# EAGLE board Qwiic_Chirp_101-Panel (EAGLE 9.6.2), part 1 of 4
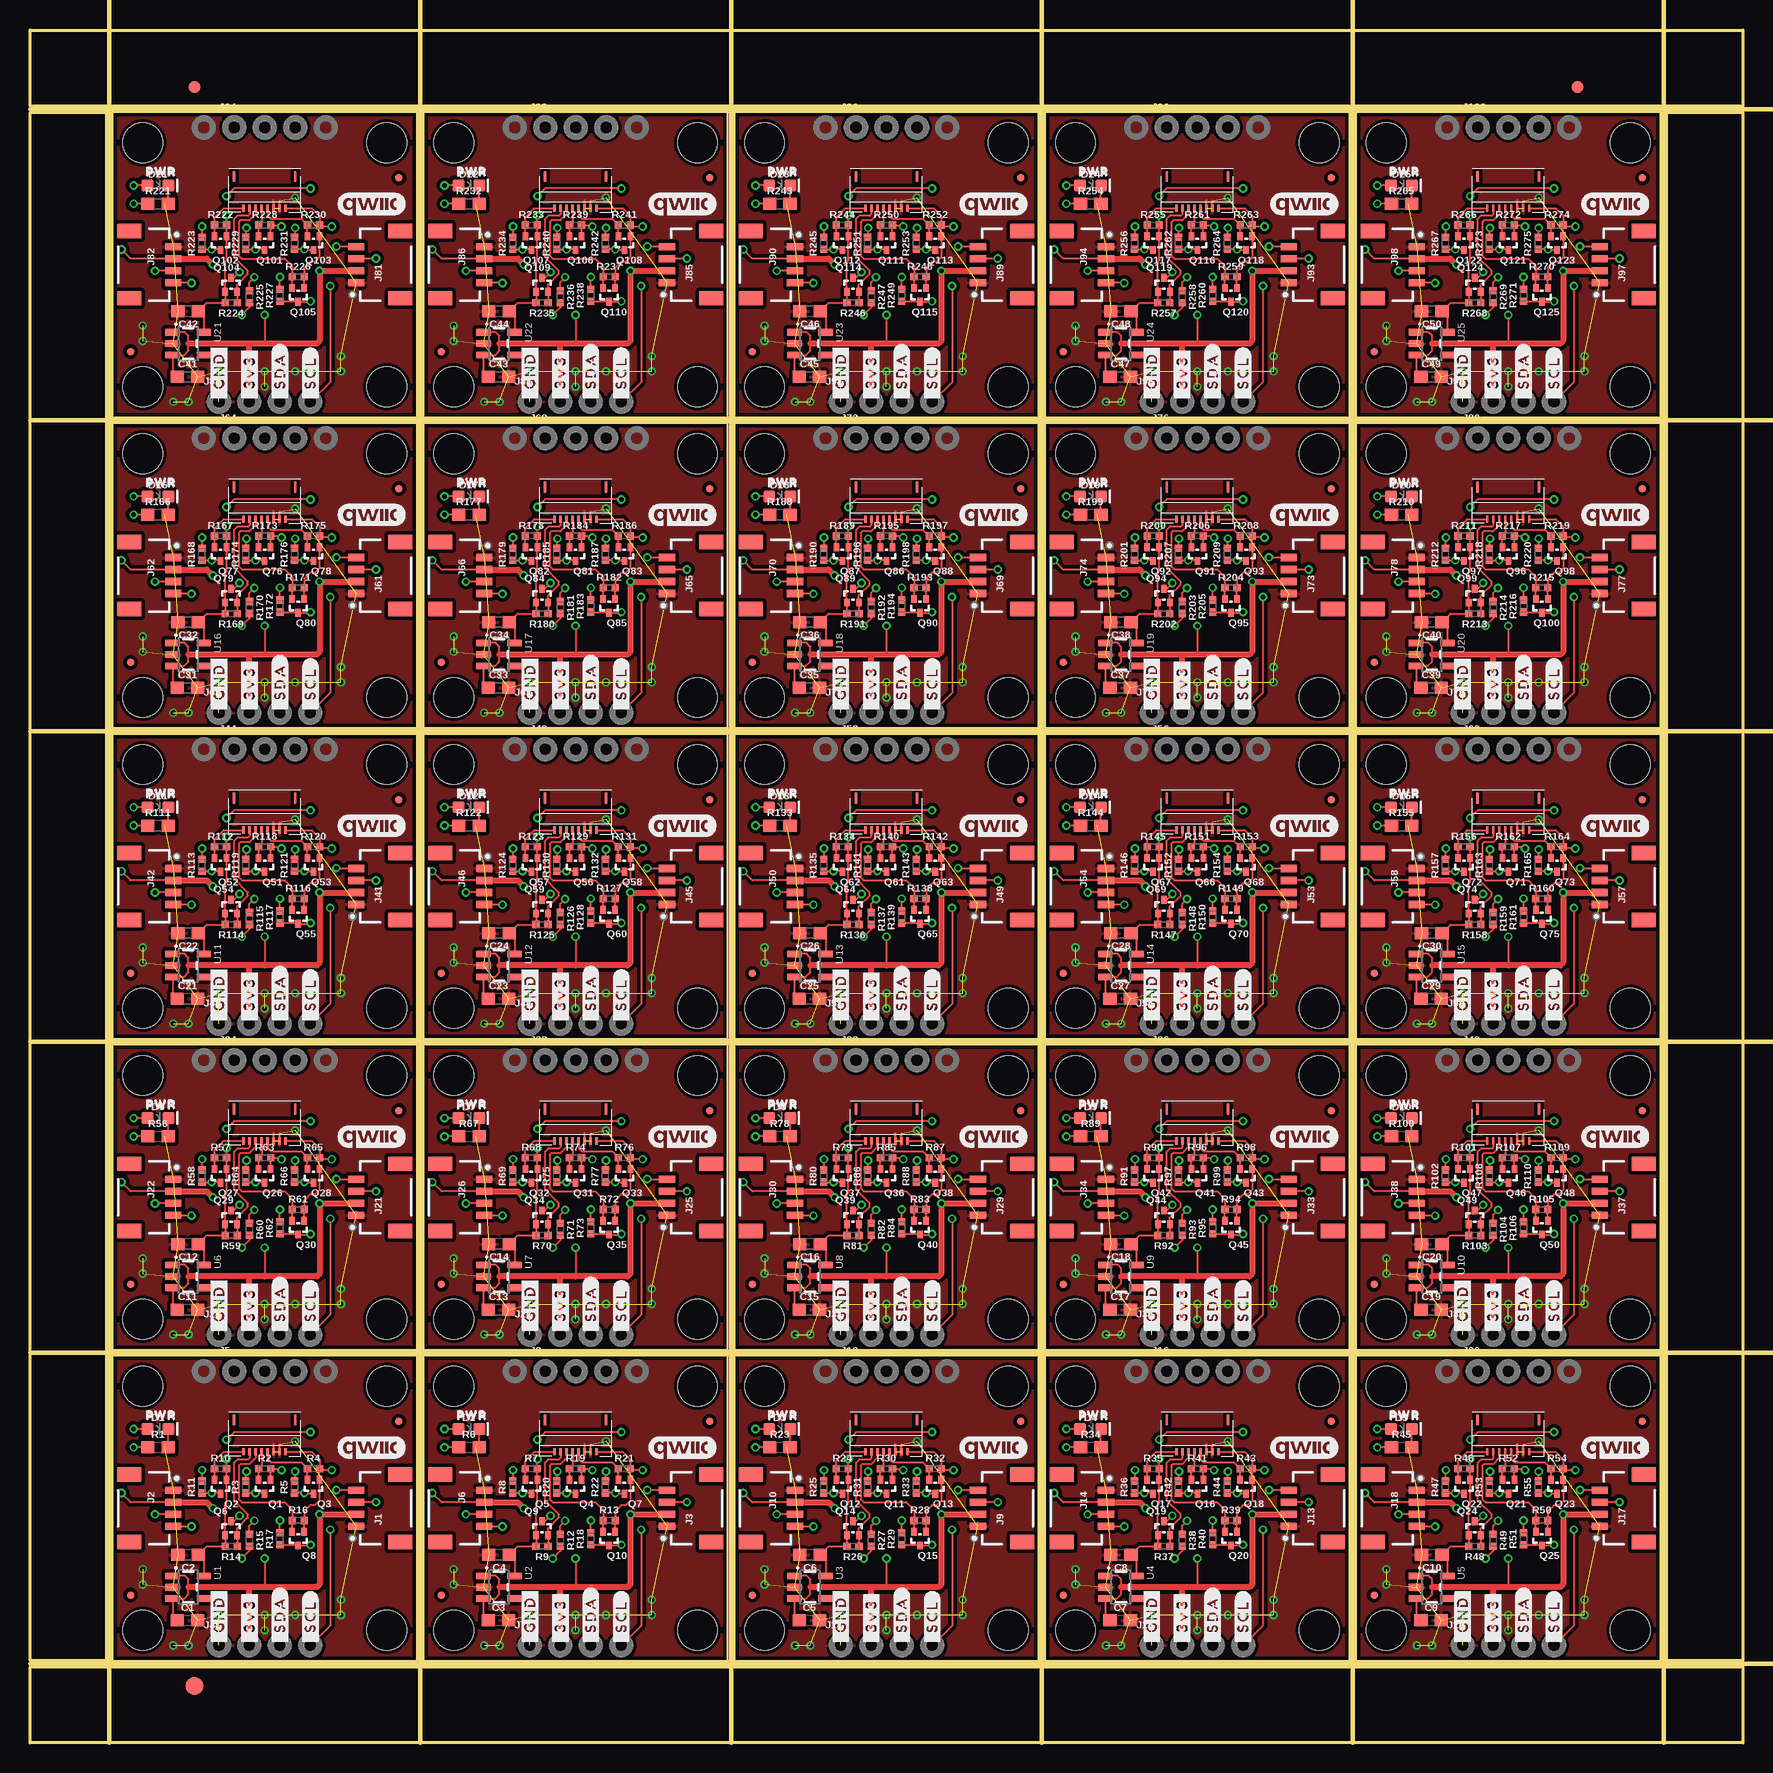
[diagram p0: board, top side]
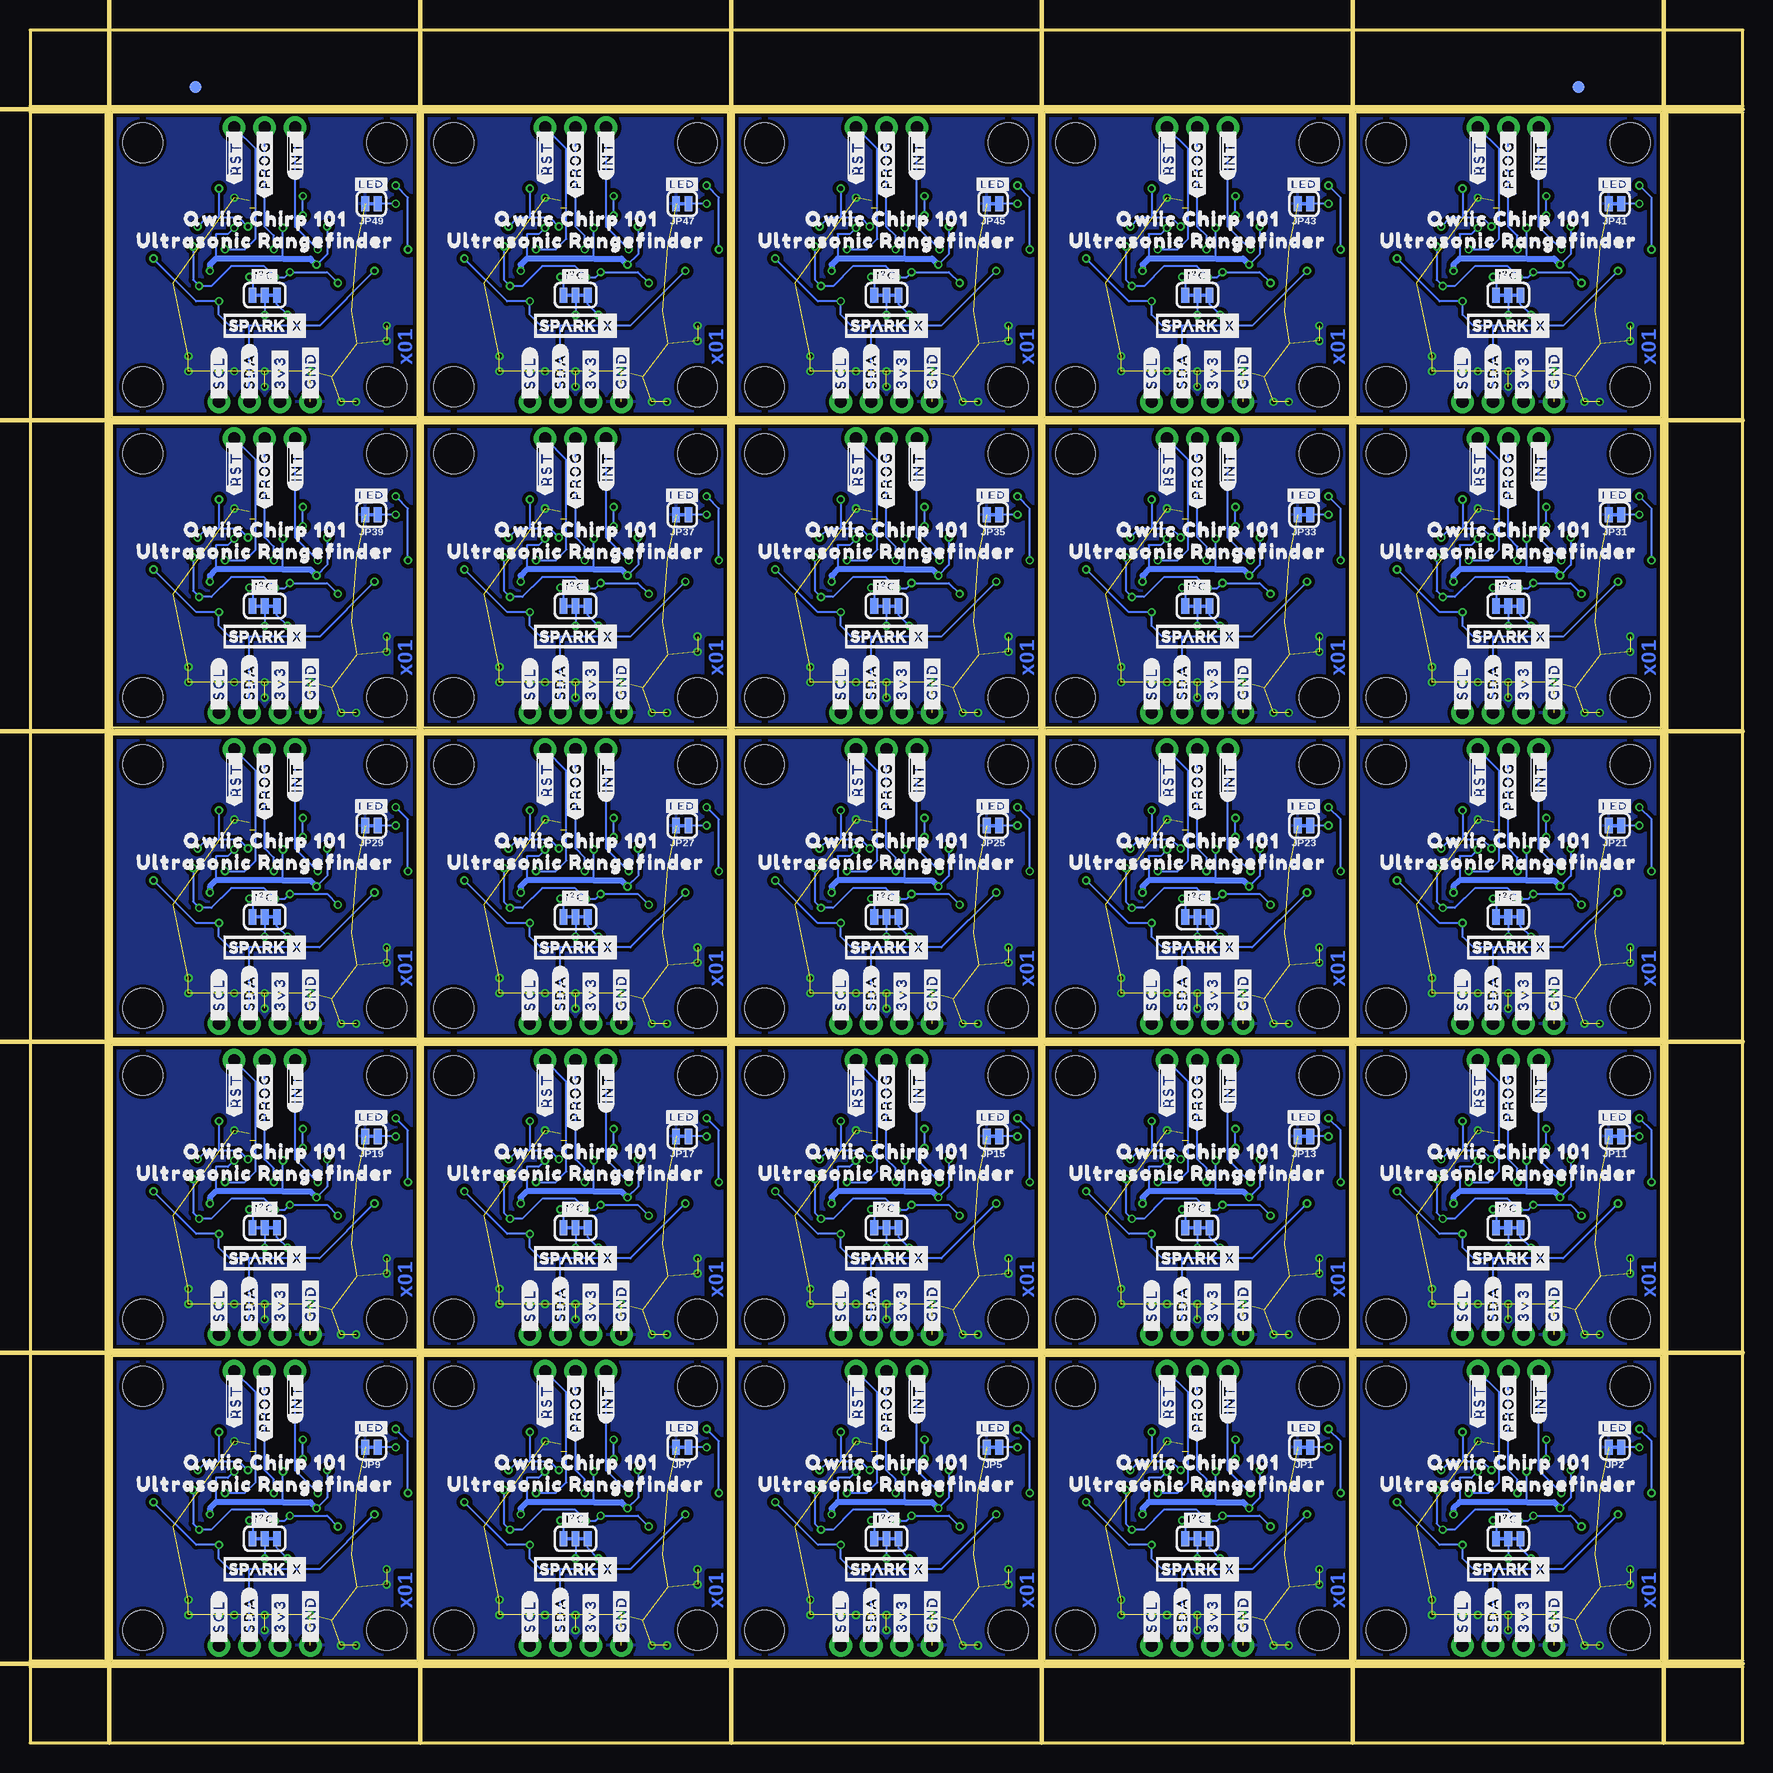
[diagram p1: board, bottom side, seen from below]

Size 142.75 x 142.75 mm. Coordinates in mm from the lower left corner, seen from the top.
Outline: 6.86,6.86 32.26,6.86 32.26,32.26 6.86,32.26 6.86,6.86
Outline: 32.77,6.86 58.17,6.86 58.17,32.26 32.77,32.26 32.77,6.86
Outline: 58.67,6.86 84.07,6.86 84.07,32.26 58.67,32.26 58.67,6.86
Outline: 84.58,6.86 109.98,6.86 109.98,32.26 84.58,32.26 84.58,6.86
Outline: 110.49,6.86 135.89,6.86 135.89,32.26 110.49,32.26 110.49,6.86
Outline: 6.86,32.77 32.26,32.77 32.26,58.17 6.86,58.17 6.86,32.77
Outline: 32.77,32.77 58.17,32.77 58.17,58.17 32.77,58.17 32.77,32.77
Outline: 58.67,32.77 84.07,32.77 84.07,58.17 58.67,58.17 58.67,32.77
Outline: 84.58,32.77 109.98,32.77 109.98,58.17 84.58,58.17 84.58,32.77
Outline: 110.49,32.77 135.89,32.77 135.89,58.17 110.49,58.17 110.49,32.77
Outline: 6.86,58.67 32.26,58.67 32.26,84.07 6.86,84.07 6.86,58.67
Outline: 32.77,58.67 58.17,58.67 58.17,84.07 32.77,84.07 32.77,58.67
Outline: 58.67,58.67 84.07,58.67 84.07,84.07 58.67,84.07 58.67,58.67
Outline: 84.58,58.67 109.98,58.67 109.98,84.07 84.58,84.07 84.58,58.67
Outline: 110.49,58.67 135.89,58.67 135.89,84.07 110.49,84.07 110.49,58.67
Outline: 6.86,84.58 32.26,84.58 32.26,109.98 6.86,109.98 6.86,84.58
Outline: 32.77,84.58 58.17,84.58 58.17,109.98 32.77,109.98 32.77,84.58
Outline: 58.67,84.58 84.07,84.58 84.07,109.98 58.67,109.98 58.67,84.58
Outline: 84.58,84.58 109.98,84.58 109.98,109.98 84.58,109.98 84.58,84.58
Outline: 110.49,84.58 135.89,84.58 135.89,109.98 110.49,109.98 110.49,84.58
Outline: 6.86,110.49 32.26,110.49 32.26,135.89 6.86,135.89 6.86,110.49
Outline: 32.77,110.49 58.17,110.49 58.17,135.89 32.77,135.89 32.77,110.49
Outline: 58.67,110.49 84.07,110.49 84.07,135.89 58.67,135.89 58.67,110.49
Outline: 84.58,110.49 109.98,110.49 109.98,135.89 84.58,135.89 84.58,110.49
Outline: 110.49,110.49 135.89,110.49 135.89,135.89 110.49,135.89 110.49,110.49
Outline: 0,6.35 142.75,6.35 142.75,0 0,0 0,6.35
Outline: 136.4,135.89 142.75,135.89 142.75,6.86 136.4,6.86 136.4,135.89
Outline: 0,142.75 142.75,142.75 142.75,136.4 0,136.4 0,142.75
Outline: 0,135.89 6.35,135.89 6.35,6.86 0,6.86 0,135.89
Copper layers (1*16): Top 0.035mm / dielectric 1.5mm / Bottom 0.035mm
Design rules "Qwiic_Chirp_101": minimum track width 6mil, minimum drill 0.3mm, track to track 6mil, track to pad 6mil, pad to pad 6mil, via to via 6mil, smd to smd 6mil, copper to edge 6mil, drill to drill 6mil, minimum pad ring 6mil, minimum via ring 6mil, stop-mask expansion 4mil, vias tented up to drill 25mil, thermal gap 10mil
Milling: 12 lines

## Footprints (pad centres in the part's own frame; a part is rotated, then mirrored left to right if it is on the bottom)
0603 = smd 1.1 x 1: 1 -0.85,0; 2 0.85,0
LED-0603 = smd 1 x 1: A -0.877,0; C 0.877,0
FIDUCIAL-1X2 = smd 1 x 1: 1 0,0
FIDUCIAL-1.5X3 = smd 1.5 x 1.5: 1 0,0
FIDUCIAL-MICRO = smd 0.635 x 0.635: 1 0,0
JST04_1MM_RA = smd 0.6 x 1.35: 1 -1.5,0; 2 -0.5,0; 3 0.5,0; 4 1.5,0 | smd 1.2 x 2: NC1 2.8,-3.675; NC2 -2.8,-3.675
1X04_NO_SILK = drill 1.016 pad 1.88: 1 0,0; 2 2.54,0; 3 5.08,0; 4 7.62,0
1X03_NO_SILK = drill 1.016 pad 1.88: 1 0,0; 2 2.54,0; 3 5.08,0
SMT-JUMPER_2_NC_TRACE_SILK = smd 0.66 x 1.27: 1 -0.521,0; 2 0.521,0
SMT-JUMPER_3_2-NC_TRACE_SILK = smd 0.635 x 1.27: 1 -1.016,0; 2 0,0; 3 1.016,0
SOT-416FL = smd 0.46 x 0.65: 1 -0.5,-1.1; 2 0.5,-1.1; 3 0,0.05
0402-TIGHT = smd 0.6 x 0.6: 1 -0.5,0; 2 0.5,0
SOT23-5 = smd 0.55 x 1.2: 1 -0.95,-1.3; 2 0,-1.3; 3 0.95,-1.3; 4 0.95,1.3; 5 -0.95,1.3
FPC_MOLEX5034800800 = smd 0.2 x 0.6: 1 -1.75,1.65; 2 -1.25,1.65; 3 -0.75,1.65; 4 -0.25,1.65; 5 0.25,1.65; 6 0.75,1.65; 7 1.25,1.65; 8 1.75,1.65 | smd 0.2 x 0.9: MNT1 -2.55,-1; MNT2 2.55,-1
QWIIC_BOARD_MOUNT_HOLES = hole 3.302: -10.16,10.16; 10.16,10.16; 10.16,-10.16; -10.16,-10.16

## Placement (x,y rotation side)
C1  1.0uF  [0603]  13.13,10.21 0 top
C2  1.0uF  [0603]  13.18,15.67 180 top
C3  1.0uF  [0603]  39.04,10.21 0 top
C4  1.0uF  [0603]  39.09,15.67 180 top
C5  1.0uF  [0603]  64.95,10.21 0 top
C6  1.0uF  [0603]  65,15.67 180 top
C7  1.0uF  [0603]  90.86,10.21 0 top
C8  1.0uF  [0603]  90.91,15.67 180 top
C9  1.0uF  [0603]  116.76,10.21 0 top
C10  1.0uF  [0603]  116.81,15.67 180 top
C11  1.0uF  [0603]  13.13,36.12 0 top
C12  1.0uF  [0603]  13.18,41.58 180 top
C13  1.0uF  [0603]  39.04,36.12 0 top
C14  1.0uF  [0603]  39.09,41.58 180 top
C15  1.0uF  [0603]  64.95,36.12 0 top
C16  1.0uF  [0603]  65,41.58 180 top
C17  1.0uF  [0603]  90.86,36.12 0 top
C18  1.0uF  [0603]  90.91,41.58 180 top
C19  1.0uF  [0603]  116.76,36.12 0 top
C20  1.0uF  [0603]  116.81,41.58 180 top
C21  1.0uF  [0603]  13.13,62.03 0 top
C22  1.0uF  [0603]  13.18,67.49 180 top
C23  1.0uF  [0603]  39.04,62.03 0 top
C24  1.0uF  [0603]  39.09,67.49 180 top
C25  1.0uF  [0603]  64.95,62.03 0 top
C26  1.0uF  [0603]  65,67.49 180 top
C27  1.0uF  [0603]  90.86,62.03 0 top
C28  1.0uF  [0603]  90.91,67.49 180 top
C29  1.0uF  [0603]  116.76,62.03 0 top
C30  1.0uF  [0603]  116.81,67.49 180 top
C31  1.0uF  [0603]  13.13,87.93 0 top
C32  1.0uF  [0603]  13.18,93.4 180 top
C33  1.0uF  [0603]  39.04,87.93 0 top
C34  1.0uF  [0603]  39.09,93.4 180 top
C35  1.0uF  [0603]  64.95,87.93 0 top
C36  1.0uF  [0603]  65,93.4 180 top
C37  1.0uF  [0603]  90.86,87.93 0 top
C38  1.0uF  [0603]  90.91,93.4 180 top
C39  1.0uF  [0603]  116.76,87.93 0 top
C40  1.0uF  [0603]  116.81,93.4 180 top
C41  1.0uF  [0603]  13.13,113.84 0 top
C42  1.0uF  [0603]  13.18,119.3 180 top
C43  1.0uF  [0603]  39.04,113.84 0 top
C44  1.0uF  [0603]  39.09,119.3 180 top
C45  1.0uF  [0603]  64.95,113.84 0 top
C46  1.0uF  [0603]  65,119.3 180 top
C47  1.0uF  [0603]  90.86,113.84 0 top
C48  1.0uF  [0603]  90.91,119.3 180 top
C49  1.0uF  [0603]  116.76,113.84 0 top
C50  1.0uF  [0603]  116.81,119.3 180 top
D1  RED  [LED-0603]  10.67,26.16 0 top
D2  RED  [LED-0603]  36.58,26.16 0 top
D3  RED  [LED-0603]  62.48,26.16 0 top
D4  RED  [LED-0603]  88.39,26.16 0 top
D5  RED  [LED-0603]  114.3,26.16 0 top
D6  RED  [LED-0603]  10.67,52.07 0 top
D7  RED  [LED-0603]  36.58,52.07 0 top
D8  RED  [LED-0603]  62.48,52.07 0 top
D9  RED  [LED-0603]  88.39,52.07 0 top
D10  RED  [LED-0603]  114.3,52.07 0 top
D11  RED  [LED-0603]  10.67,77.98 0 top
D12  RED  [LED-0603]  36.58,77.98 0 top
D13  RED  [LED-0603]  62.48,77.98 0 top
D14  RED  [LED-0603]  88.39,77.98 0 top
D15  RED  [LED-0603]  114.3,77.98 0 top
D16  RED  [LED-0603]  10.67,103.89 0 top
D17  RED  [LED-0603]  36.58,103.89 0 top
D18  RED  [LED-0603]  62.48,103.89 0 top
D19  RED  [LED-0603]  88.39,103.89 0 top
D20  RED  [LED-0603]  114.3,103.89 0 top
D21  RED  [LED-0603]  10.67,129.79 0 top
D22  RED  [LED-0603]  36.58,129.79 0 top
D23  RED  [LED-0603]  62.48,129.79 0 top
D24  RED  [LED-0603]  88.39,129.79 0 top
D25  RED  [LED-0603]  114.3,129.79 0 top
E$1  [FIDUCIAL-1X2]  13.72,137.99 0 top
E$2  [FIDUCIAL-1X2]  13.72,137.99 0 bottom
E$3  [FIDUCIAL-1X2]  128.97,137.99 0 top
E$4  [FIDUCIAL-1X2]  128.97,137.99 0 bottom
E$5  [FIDUCIAL-1.5X3]  13.72,4.76 0 top
FD1  FIDUCIALUFIDUCIAL  [FIDUCIAL-MICRO]  8.38,12.32 0 top
FD2  FIDUCIALUFIDUCIAL  [FIDUCIAL-MICRO]  30.73,26.8 0 top
FD3  FIDUCIALUFIDUCIAL  [FIDUCIAL-MICRO]  34.29,12.32 0 top
FD4  FIDUCIALUFIDUCIAL  [FIDUCIAL-MICRO]  56.64,26.8 0 top
FD5  FIDUCIALUFIDUCIAL  [FIDUCIAL-MICRO]  60.2,12.32 0 top
FD6  FIDUCIALUFIDUCIAL  [FIDUCIAL-MICRO]  82.55,26.8 0 top
FD7  FIDUCIALUFIDUCIAL  [FIDUCIAL-MICRO]  86.11,12.32 0 top
FD8  FIDUCIALUFIDUCIAL  [FIDUCIAL-MICRO]  108.46,26.8 0 top
FD9  FIDUCIALUFIDUCIAL  [FIDUCIAL-MICRO]  112.01,12.32 0 top
FD10  FIDUCIALUFIDUCIAL  [FIDUCIAL-MICRO]  134.37,26.8 0 top
FD11  FIDUCIALUFIDUCIAL  [FIDUCIAL-MICRO]  8.38,38.23 0 top
FD12  FIDUCIALUFIDUCIAL  [FIDUCIAL-MICRO]  30.73,52.7 0 top
FD13  FIDUCIALUFIDUCIAL  [FIDUCIAL-MICRO]  34.29,38.23 0 top
FD14  FIDUCIALUFIDUCIAL  [FIDUCIAL-MICRO]  56.64,52.7 0 top
FD15  FIDUCIALUFIDUCIAL  [FIDUCIAL-MICRO]  60.2,38.23 0 top
FD16  FIDUCIALUFIDUCIAL  [FIDUCIAL-MICRO]  82.55,52.7 0 top
FD17  FIDUCIALUFIDUCIAL  [FIDUCIAL-MICRO]  86.11,38.23 0 top
FD18  FIDUCIALUFIDUCIAL  [FIDUCIAL-MICRO]  108.46,52.7 0 top
FD19  FIDUCIALUFIDUCIAL  [FIDUCIAL-MICRO]  112.01,38.23 0 top
FD20  FIDUCIALUFIDUCIAL  [FIDUCIAL-MICRO]  134.37,52.7 0 top
FD21  FIDUCIALUFIDUCIAL  [FIDUCIAL-MICRO]  8.38,64.14 0 top
FD22  FIDUCIALUFIDUCIAL  [FIDUCIAL-MICRO]  30.73,78.61 0 top
FD23  FIDUCIALUFIDUCIAL  [FIDUCIAL-MICRO]  34.29,64.14 0 top
FD24  FIDUCIALUFIDUCIAL  [FIDUCIAL-MICRO]  56.64,78.61 0 top
FD25  FIDUCIALUFIDUCIAL  [FIDUCIAL-MICRO]  60.2,64.14 0 top
FD26  FIDUCIALUFIDUCIAL  [FIDUCIAL-MICRO]  82.55,78.61 0 top
FD27  FIDUCIALUFIDUCIAL  [FIDUCIAL-MICRO]  86.11,64.14 0 top
FD28  FIDUCIALUFIDUCIAL  [FIDUCIAL-MICRO]  108.46,78.61 0 top
FD29  FIDUCIALUFIDUCIAL  [FIDUCIAL-MICRO]  112.01,64.14 0 top
FD30  FIDUCIALUFIDUCIAL  [FIDUCIAL-MICRO]  134.37,78.61 0 top
FD31  FIDUCIALUFIDUCIAL  [FIDUCIAL-MICRO]  8.38,90.04 0 top
FD32  FIDUCIALUFIDUCIAL  [FIDUCIAL-MICRO]  30.73,104.52 0 top
FD33  FIDUCIALUFIDUCIAL  [FIDUCIAL-MICRO]  34.29,90.04 0 top
FD34  FIDUCIALUFIDUCIAL  [FIDUCIAL-MICRO]  56.64,104.52 0 top
FD35  FIDUCIALUFIDUCIAL  [FIDUCIAL-MICRO]  60.2,90.04 0 top
FD36  FIDUCIALUFIDUCIAL  [FIDUCIAL-MICRO]  82.55,104.52 0 top
FD37  FIDUCIALUFIDUCIAL  [FIDUCIAL-MICRO]  86.11,90.04 0 top
FD38  FIDUCIALUFIDUCIAL  [FIDUCIAL-MICRO]  108.46,104.52 0 top
FD39  FIDUCIALUFIDUCIAL  [FIDUCIAL-MICRO]  112.01,90.04 0 top
FD40  FIDUCIALUFIDUCIAL  [FIDUCIAL-MICRO]  134.37,104.52 0 top
FD41  FIDUCIALUFIDUCIAL  [FIDUCIAL-MICRO]  8.38,115.95 0 top
FD42  FIDUCIALUFIDUCIAL  [FIDUCIAL-MICRO]  30.73,130.43 0 top
FD43  FIDUCIALUFIDUCIAL  [FIDUCIAL-MICRO]  34.29,115.95 0 top
FD44  FIDUCIALUFIDUCIAL  [FIDUCIAL-MICRO]  56.64,130.43 0 top
FD45  FIDUCIALUFIDUCIAL  [FIDUCIAL-MICRO]  60.2,115.95 0 top
FD46  FIDUCIALUFIDUCIAL  [FIDUCIAL-MICRO]  82.55,130.43 0 top
FD47  FIDUCIALUFIDUCIAL  [FIDUCIAL-MICRO]  86.11,115.95 0 top
FD48  FIDUCIALUFIDUCIAL  [FIDUCIAL-MICRO]  108.46,130.43 0 top
FD49  FIDUCIALUFIDUCIAL  [FIDUCIAL-MICRO]  112.01,115.95 0 top
FD50  FIDUCIALUFIDUCIAL  [FIDUCIAL-MICRO]  134.37,130.43 0 top
FRAME1  FRAME-LETTERNO_PACKAGE  [DUMMY]  6.86,6.86 0 top
FRAME2  FRAME-LETTERNO_PACKAGE  [DUMMY]  32.77,6.86 0 top
FRAME3  FRAME-LETTERNO_PACKAGE  [DUMMY]  58.67,6.86 0 top
FRAME4  FRAME-LETTERNO_PACKAGE  [DUMMY]  84.58,6.86 0 top
FRAME5  FRAME-LETTERNO_PACKAGE  [DUMMY]  110.49,6.86 0 top
FRAME6  FRAME-LETTERNO_PACKAGE  [DUMMY]  6.86,32.77 0 top
FRAME7  FRAME-LETTERNO_PACKAGE  [DUMMY]  32.77,32.77 0 top
FRAME8  FRAME-LETTERNO_PACKAGE  [DUMMY]  58.67,32.77 0 top
FRAME9  FRAME-LETTERNO_PACKAGE  [DUMMY]  84.58,32.77 0 top
FRAME10  FRAME-LETTERNO_PACKAGE  [DUMMY]  110.49,32.77 0 top
FRAME11  FRAME-LETTERNO_PACKAGE  [DUMMY]  6.86,58.67 0 top
FRAME12  FRAME-LETTERNO_PACKAGE  [DUMMY]  32.77,58.67 0 top
FRAME13  FRAME-LETTERNO_PACKAGE  [DUMMY]  58.67,58.67 0 top
FRAME14  FRAME-LETTERNO_PACKAGE  [DUMMY]  84.58,58.67 0 top
FRAME15  FRAME-LETTERNO_PACKAGE  [DUMMY]  110.49,58.67 0 top
FRAME16  FRAME-LETTERNO_PACKAGE  [DUMMY]  6.86,84.58 0 top
FRAME17  FRAME-LETTERNO_PACKAGE  [DUMMY]  32.77,84.58 0 top
FRAME18  FRAME-LETTERNO_PACKAGE  [DUMMY]  58.67,84.58 0 top
FRAME19  FRAME-LETTERNO_PACKAGE  [DUMMY]  84.58,84.58 0 top
FRAME20  FRAME-LETTERNO_PACKAGE  [DUMMY]  110.49,84.58 0 top
FRAME21  FRAME-LETTERNO_PACKAGE  [DUMMY]  6.86,110.49 0 top
FRAME22  FRAME-LETTERNO_PACKAGE  [DUMMY]  32.77,110.49 0 top
FRAME23  FRAME-LETTERNO_PACKAGE  [DUMMY]  58.67,110.49 0 top
FRAME24  FRAME-LETTERNO_PACKAGE  [DUMMY]  84.58,110.49 0 top
FRAME25  FRAME-LETTERNO_PACKAGE  [DUMMY]  110.49,110.49 0 top
J1  QWIIC_RIGHT_ANGLE  [JST04_1MM_RA]  27.18,19.56 90 top
J2  QWIIC_RIGHT_ANGLE  [JST04_1MM_RA]  11.94,19.56 270 top
J3  QWIIC_RIGHT_ANGLE  [JST04_1MM_RA]  53.09,19.56 90 top
J4  [1X04_NO_SILK]  15.75,8.13 0 top
J5  [1X03_NO_SILK]  17.02,30.99 0 top
J6  QWIIC_RIGHT_ANGLE  [JST04_1MM_RA]  37.85,19.56 270 top
J7  [1X04_NO_SILK]  41.66,8.13 0 top
J8  [1X03_NO_SILK]  42.93,30.99 0 top
J9  QWIIC_RIGHT_ANGLE  [JST04_1MM_RA]  78.99,19.56 90 top
J10  QWIIC_RIGHT_ANGLE  [JST04_1MM_RA]  63.75,19.56 270 top
J11  [1X04_NO_SILK]  67.56,8.13 0 top
J12  [1X03_NO_SILK]  68.83,30.99 0 top
J13  QWIIC_RIGHT_ANGLE  [JST04_1MM_RA]  104.9,19.56 90 top
J14  QWIIC_RIGHT_ANGLE  [JST04_1MM_RA]  89.66,19.56 270 top
J15  [1X04_NO_SILK]  93.47,8.13 0 top
J16  [1X03_NO_SILK]  94.74,30.99 0 top
J17  QWIIC_RIGHT_ANGLE  [JST04_1MM_RA]  130.81,19.56 90 top
J18  QWIIC_RIGHT_ANGLE  [JST04_1MM_RA]  115.57,19.56 270 top
J19  [1X04_NO_SILK]  119.38,8.13 0 top
J20  [1X03_NO_SILK]  120.65,30.99 0 top
J21  QWIIC_RIGHT_ANGLE  [JST04_1MM_RA]  27.18,45.47 90 top
J22  QWIIC_RIGHT_ANGLE  [JST04_1MM_RA]  11.94,45.47 270 top
J23  [1X04_NO_SILK]  15.75,34.04 0 top
J24  [1X03_NO_SILK]  17.02,56.9 0 top
J25  QWIIC_RIGHT_ANGLE  [JST04_1MM_RA]  53.09,45.47 90 top
J26  QWIIC_RIGHT_ANGLE  [JST04_1MM_RA]  37.85,45.47 270 top
J27  [1X04_NO_SILK]  41.66,34.04 0 top
J28  [1X03_NO_SILK]  42.93,56.9 0 top
J29  QWIIC_RIGHT_ANGLE  [JST04_1MM_RA]  78.99,45.47 90 top
J30  QWIIC_RIGHT_ANGLE  [JST04_1MM_RA]  63.75,45.47 270 top
J31  [1X04_NO_SILK]  67.56,34.04 0 top
J32  [1X03_NO_SILK]  68.83,56.9 0 top
J33  QWIIC_RIGHT_ANGLE  [JST04_1MM_RA]  104.9,45.47 90 top
J34  QWIIC_RIGHT_ANGLE  [JST04_1MM_RA]  89.66,45.47 270 top
J35  [1X04_NO_SILK]  93.47,34.04 0 top
J36  [1X03_NO_SILK]  94.74,56.9 0 top
J37  QWIIC_RIGHT_ANGLE  [JST04_1MM_RA]  130.81,45.47 90 top
J38  QWIIC_RIGHT_ANGLE  [JST04_1MM_RA]  115.57,45.47 270 top
J39  [1X04_NO_SILK]  119.38,34.04 0 top
J40  [1X03_NO_SILK]  120.65,56.9 0 top
J41  QWIIC_RIGHT_ANGLE  [JST04_1MM_RA]  27.18,71.37 90 top
J42  QWIIC_RIGHT_ANGLE  [JST04_1MM_RA]  11.94,71.37 270 top
J43  [1X04_NO_SILK]  15.75,59.94 0 top
J44  [1X03_NO_SILK]  17.02,82.8 0 top
J45  QWIIC_RIGHT_ANGLE  [JST04_1MM_RA]  53.09,71.37 90 top
J46  QWIIC_RIGHT_ANGLE  [JST04_1MM_RA]  37.85,71.37 270 top
J47  [1X04_NO_SILK]  41.66,59.94 0 top
J48  [1X03_NO_SILK]  42.93,82.8 0 top
J49  QWIIC_RIGHT_ANGLE  [JST04_1MM_RA]  78.99,71.37 90 top
J50  QWIIC_RIGHT_ANGLE  [JST04_1MM_RA]  63.75,71.37 270 top
J51  [1X04_NO_SILK]  67.56,59.94 0 top
J52  [1X03_NO_SILK]  68.83,82.8 0 top
J53  QWIIC_RIGHT_ANGLE  [JST04_1MM_RA]  104.9,71.37 90 top
J54  QWIIC_RIGHT_ANGLE  [JST04_1MM_RA]  89.66,71.37 270 top
J55  [1X04_NO_SILK]  93.47,59.94 0 top
J56  [1X03_NO_SILK]  94.74,82.8 0 top
J57  QWIIC_RIGHT_ANGLE  [JST04_1MM_RA]  130.81,71.37 90 top
J58  QWIIC_RIGHT_ANGLE  [JST04_1MM_RA]  115.57,71.37 270 top
J59  [1X04_NO_SILK]  119.38,59.94 0 top
J60  [1X03_NO_SILK]  120.65,82.8 0 top
J61  QWIIC_RIGHT_ANGLE  [JST04_1MM_RA]  27.18,97.28 90 top
J62  QWIIC_RIGHT_ANGLE  [JST04_1MM_RA]  11.94,97.28 270 top
J63  [1X04_NO_SILK]  15.75,85.85 0 top
J64  [1X03_NO_SILK]  17.02,108.71 0 top
J65  QWIIC_RIGHT_ANGLE  [JST04_1MM_RA]  53.09,97.28 90 top
J66  QWIIC_RIGHT_ANGLE  [JST04_1MM_RA]  37.85,97.28 270 top
J67  [1X04_NO_SILK]  41.66,85.85 0 top
J68  [1X03_NO_SILK]  42.93,108.71 0 top
J69  QWIIC_RIGHT_ANGLE  [JST04_1MM_RA]  78.99,97.28 90 top
J70  QWIIC_RIGHT_ANGLE  [JST04_1MM_RA]  63.75,97.28 270 top
J71  [1X04_NO_SILK]  67.56,85.85 0 top
J72  [1X03_NO_SILK]  68.83,108.71 0 top
J73  QWIIC_RIGHT_ANGLE  [JST04_1MM_RA]  104.9,97.28 90 top
J74  QWIIC_RIGHT_ANGLE  [JST04_1MM_RA]  89.66,97.28 270 top
J75  [1X04_NO_SILK]  93.47,85.85 0 top
J76  [1X03_NO_SILK]  94.74,108.71 0 top
J77  QWIIC_RIGHT_ANGLE  [JST04_1MM_RA]  130.81,97.28 90 top
J78  QWIIC_RIGHT_ANGLE  [JST04_1MM_RA]  115.57,97.28 270 top
J79  [1X04_NO_SILK]  119.38,85.85 0 top
J80  [1X03_NO_SILK]  120.65,108.71 0 top
J81  QWIIC_RIGHT_ANGLE  [JST04_1MM_RA]  27.18,123.19 90 top
J82  QWIIC_RIGHT_ANGLE  [JST04_1MM_RA]  11.94,123.19 270 top
J83  [1X04_NO_SILK]  15.75,111.76 0 top
J84  [1X03_NO_SILK]  17.02,134.62 0 top
J85  QWIIC_RIGHT_ANGLE  [JST04_1MM_RA]  53.09,123.19 90 top
J86  QWIIC_RIGHT_ANGLE  [JST04_1MM_RA]  37.85,123.19 270 top
J87  [1X04_NO_SILK]  41.66,111.76 0 top
J88  [1X03_NO_SILK]  42.93,134.62 0 top
J89  QWIIC_RIGHT_ANGLE  [JST04_1MM_RA]  78.99,123.19 90 top
J90  QWIIC_RIGHT_ANGLE  [JST04_1MM_RA]  63.75,123.19 270 top
J91  [1X04_NO_SILK]  67.56,111.76 0 top
J92  [1X03_NO_SILK]  68.83,134.62 0 top
J93  QWIIC_RIGHT_ANGLE  [JST04_1MM_RA]  104.9,123.19 90 top
J94  QWIIC_RIGHT_ANGLE  [JST04_1MM_RA]  89.66,123.19 270 top
J95  [1X04_NO_SILK]  93.47,111.76 0 top
J96  [1X03_NO_SILK]  94.74,134.62 0 top
J97  QWIIC_RIGHT_ANGLE  [JST04_1MM_RA]  130.81,123.19 90 top
J98  QWIIC_RIGHT_ANGLE  [JST04_1MM_RA]  115.57,123.19 270 top
J99  [1X04_NO_SILK]  119.38,111.76 0 top
J100  [1X03_NO_SILK]  120.65,134.62 0 top
JP1  [SMT-JUMPER_2_NC_TRACE_SILK]  36.58,24.64 180 bottom
JP2  [SMT-JUMPER_2_NC_TRACE_SILK]  10.67,24.64 180 bottom
JP3  I2C PU  [SMT-JUMPER_3_2-NC_TRACE_SILK]  45.47,17.02 0 bottom
JP4  I2C PU  [SMT-JUMPER_3_2-NC_TRACE_SILK]  19.56,17.02 0 bottom
JP5  [SMT-JUMPER_2_NC_TRACE_SILK]  62.48,24.64 180 bottom
JP6  I2C PU  [SMT-JUMPER_3_2-NC_TRACE_SILK]  71.37,17.02 0 bottom
JP7  [SMT-JUMPER_2_NC_TRACE_SILK]  88.39,24.64 180 bottom
JP8  I2C PU  [SMT-JUMPER_3_2-NC_TRACE_SILK]  97.28,17.02 0 bottom
JP9  [SMT-JUMPER_2_NC_TRACE_SILK]  114.3,24.64 180 bottom
JP10  I2C PU  [SMT-JUMPER_3_2-NC_TRACE_SILK]  123.19,17.02 0 bottom
JP11  [SMT-JUMPER_2_NC_TRACE_SILK]  10.67,50.55 180 bottom
JP12  I2C PU  [SMT-JUMPER_3_2-NC_TRACE_SILK]  19.56,42.93 0 bottom
JP13  [SMT-JUMPER_2_NC_TRACE_SILK]  36.58,50.55 180 bottom
JP14  I2C PU  [SMT-JUMPER_3_2-NC_TRACE_SILK]  45.47,42.93 0 bottom
JP15  [SMT-JUMPER_2_NC_TRACE_SILK]  62.48,50.55 180 bottom
JP16  I2C PU  [SMT-JUMPER_3_2-NC_TRACE_SILK]  71.37,42.93 0 bottom
JP17  [SMT-JUMPER_2_NC_TRACE_SILK]  88.39,50.55 180 bottom
JP18  I2C PU  [SMT-JUMPER_3_2-NC_TRACE_SILK]  97.28,42.93 0 bottom
JP19  [SMT-JUMPER_2_NC_TRACE_SILK]  114.3,50.55 180 bottom
JP20  I2C PU  [SMT-JUMPER_3_2-NC_TRACE_SILK]  123.19,42.93 0 bottom
JP21  [SMT-JUMPER_2_NC_TRACE_SILK]  10.67,76.45 180 bottom
JP22  I2C PU  [SMT-JUMPER_3_2-NC_TRACE_SILK]  19.56,68.83 0 bottom
JP23  [SMT-JUMPER_2_NC_TRACE_SILK]  36.58,76.45 180 bottom
JP24  I2C PU  [SMT-JUMPER_3_2-NC_TRACE_SILK]  45.47,68.83 0 bottom
JP25  [SMT-JUMPER_2_NC_TRACE_SILK]  62.48,76.45 180 bottom
JP26  I2C PU  [SMT-JUMPER_3_2-NC_TRACE_SILK]  71.37,68.83 0 bottom
JP27  [SMT-JUMPER_2_NC_TRACE_SILK]  88.39,76.45 180 bottom
JP28  I2C PU  [SMT-JUMPER_3_2-NC_TRACE_SILK]  97.28,68.83 0 bottom
JP29  [SMT-JUMPER_2_NC_TRACE_SILK]  114.3,76.45 180 bottom
JP30  I2C PU  [SMT-JUMPER_3_2-NC_TRACE_SILK]  123.19,68.83 0 bottom
JP31  [SMT-JUMPER_2_NC_TRACE_SILK]  10.67,102.36 180 bottom
JP32  I2C PU  [SMT-JUMPER_3_2-NC_TRACE_SILK]  19.56,94.74 0 bottom
JP33  [SMT-JUMPER_2_NC_TRACE_SILK]  36.58,102.36 180 bottom
JP34  I2C PU  [SMT-JUMPER_3_2-NC_TRACE_SILK]  45.47,94.74 0 bottom
JP35  [SMT-JUMPER_2_NC_TRACE_SILK]  62.48,102.36 180 bottom
JP36  I2C PU  [SMT-JUMPER_3_2-NC_TRACE_SILK]  71.37,94.74 0 bottom
JP37  [SMT-JUMPER_2_NC_TRACE_SILK]  88.39,102.36 180 bottom
JP38  I2C PU  [SMT-JUMPER_3_2-NC_TRACE_SILK]  97.28,94.74 0 bottom
JP39  [SMT-JUMPER_2_NC_TRACE_SILK]  114.3,102.36 180 bottom
JP40  I2C PU  [SMT-JUMPER_3_2-NC_TRACE_SILK]  123.19,94.74 0 bottom
JP41  [SMT-JUMPER_2_NC_TRACE_SILK]  10.67,128.27 180 bottom
JP42  I2C PU  [SMT-JUMPER_3_2-NC_TRACE_SILK]  19.56,120.65 0 bottom
JP43  [SMT-JUMPER_2_NC_TRACE_SILK]  36.58,128.27 180 bottom
JP44  I2C PU  [SMT-JUMPER_3_2-NC_TRACE_SILK]  45.47,120.65 0 bottom
JP45  [SMT-JUMPER_2_NC_TRACE_SILK]  62.48,128.27 180 bottom
JP46  I2C PU  [SMT-JUMPER_3_2-NC_TRACE_SILK]  71.37,120.65 0 bottom
JP47  [SMT-JUMPER_2_NC_TRACE_SILK]  88.39,128.27 180 bottom
JP48  I2C PU  [SMT-JUMPER_3_2-NC_TRACE_SILK]  97.28,120.65 0 bottom
JP49  [SMT-JUMPER_2_NC_TRACE_SILK]  114.3,128.27 180 bottom
JP50  I2C PU  [SMT-JUMPER_3_2-NC_TRACE_SILK]  123.19,120.65 0 bottom
Q1  20V/0.2A/8MHz/1.2Ω/1Vth  [SOT-416FL]  19.56,20.83 180 top
Q2  20V/0.2A/8MHz/1.2Ω/1Vth  [SOT-416FL]  15.88,20.83 180 top
Q3  20V/0.2A/8MHz/1.2Ω/1Vth  [SOT-416FL]  23.62,20.83 180 top
Q4  20V/0.2A/8MHz/1.2Ω/1Vth  [SOT-416FL]  45.47,20.83 180 top
Q5  20V/0.2A/8MHz/1.2Ω/1Vth  [SOT-416FL]  41.78,20.83 180 top
Q6  20V/0.2A/8MHz/1.2Ω/1Vth  [SOT-416FL]  16.76,18.41 0 top
Q7  20V/0.2A/8MHz/1.2Ω/1Vth  [SOT-416FL]  49.53,20.83 180 top
Q8  20V/0.2A/8MHz/1.2Ω/1Vth  [SOT-416FL]  22.35,16.51 180 top
Q9  20V/0.2A/8MHz/1.2Ω/1Vth  [SOT-416FL]  42.67,18.41 0 top
Q10  20V/0.2A/8MHz/1.2Ω/1Vth  [SOT-416FL]  48.26,16.51 180 top
Q11  20V/0.2A/8MHz/1.2Ω/1Vth  [SOT-416FL]  71.37,20.83 180 top
Q12  20V/0.2A/8MHz/1.2Ω/1Vth  [SOT-416FL]  67.69,20.83 180 top
Q13  20V/0.2A/8MHz/1.2Ω/1Vth  [SOT-416FL]  75.44,20.83 180 top
Q14  20V/0.2A/8MHz/1.2Ω/1Vth  [SOT-416FL]  68.58,18.41 0 top
Q15  20V/0.2A/8MHz/1.2Ω/1Vth  [SOT-416FL]  74.17,16.51 180 top
Q16  20V/0.2A/8MHz/1.2Ω/1Vth  [SOT-416FL]  97.28,20.83 180 top
Q17  20V/0.2A/8MHz/1.2Ω/1Vth  [SOT-416FL]  93.6,20.83 180 top
Q18  20V/0.2A/8MHz/1.2Ω/1Vth  [SOT-416FL]  101.35,20.83 180 top
Q19  20V/0.2A/8MHz/1.2Ω/1Vth  [SOT-416FL]  94.49,18.41 0 top
Q20  20V/0.2A/8MHz/1.2Ω/1Vth  [SOT-416FL]  100.08,16.51 180 top
Q21  20V/0.2A/8MHz/1.2Ω/1Vth  [SOT-416FL]  123.19,20.83 180 top
Q22  20V/0.2A/8MHz/1.2Ω/1Vth  [SOT-416FL]  119.51,20.83 180 top
Q23  20V/0.2A/8MHz/1.2Ω/1Vth  [SOT-416FL]  127.25,20.83 180 top
Q24  20V/0.2A/8MHz/1.2Ω/1Vth  [SOT-416FL]  120.4,18.41 0 top
Q25  20V/0.2A/8MHz/1.2Ω/1Vth  [SOT-416FL]  125.98,16.51 180 top
Q26  20V/0.2A/8MHz/1.2Ω/1Vth  [SOT-416FL]  19.56,46.74 180 top
Q27  20V/0.2A/8MHz/1.2Ω/1Vth  [SOT-416FL]  15.88,46.74 180 top
Q28  20V/0.2A/8MHz/1.2Ω/1Vth  [SOT-416FL]  23.62,46.74 180 top
Q29  20V/0.2A/8MHz/1.2Ω/1Vth  [SOT-416FL]  16.76,44.32 0 top
Q30  20V/0.2A/8MHz/1.2Ω/1Vth  [SOT-416FL]  22.35,42.42 180 top
Q31  20V/0.2A/8MHz/1.2Ω/1Vth  [SOT-416FL]  45.47,46.74 180 top
Q32  20V/0.2A/8MHz/1.2Ω/1Vth  [SOT-416FL]  41.78,46.74 180 top
Q33  20V/0.2A/8MHz/1.2Ω/1Vth  [SOT-416FL]  49.53,46.74 180 top
Q34  20V/0.2A/8MHz/1.2Ω/1Vth  [SOT-416FL]  42.67,44.32 0 top
Q35  20V/0.2A/8MHz/1.2Ω/1Vth  [SOT-416FL]  48.26,42.42 180 top
Q36  20V/0.2A/8MHz/1.2Ω/1Vth  [SOT-416FL]  71.37,46.74 180 top
Q37  20V/0.2A/8MHz/1.2Ω/1Vth  [SOT-416FL]  67.69,46.74 180 top
Q38  20V/0.2A/8MHz/1.2Ω/1Vth  [SOT-416FL]  75.44,46.74 180 top
Q39  20V/0.2A/8MHz/1.2Ω/1Vth  [SOT-416FL]  68.58,44.32 0 top
Q40  20V/0.2A/8MHz/1.2Ω/1Vth  [SOT-416FL]  74.17,42.42 180 top
Q41  20V/0.2A/8MHz/1.2Ω/1Vth  [SOT-416FL]  97.28,46.74 180 top
Q42  20V/0.2A/8MHz/1.2Ω/1Vth  [SOT-416FL]  93.6,46.74 180 top
Q43  20V/0.2A/8MHz/1.2Ω/1Vth  [SOT-416FL]  101.35,46.74 180 top
Q44  20V/0.2A/8MHz/1.2Ω/1Vth  [SOT-416FL]  94.49,44.32 0 top
Q45  20V/0.2A/8MHz/1.2Ω/1Vth  [SOT-416FL]  100.08,42.42 180 top
Q46  20V/0.2A/8MHz/1.2Ω/1Vth  [SOT-416FL]  123.19,46.74 180 top
Q47  20V/0.2A/8MHz/1.2Ω/1Vth  [SOT-416FL]  119.51,46.74 180 top
Q48  20V/0.2A/8MHz/1.2Ω/1Vth  [SOT-416FL]  127.25,46.74 180 top
Q49  20V/0.2A/8MHz/1.2Ω/1Vth  [SOT-416FL]  120.4,44.32 0 top
Q50  20V/0.2A/8MHz/1.2Ω/1Vth  [SOT-416FL]  125.98,42.42 180 top
Q51  20V/0.2A/8MHz/1.2Ω/1Vth  [SOT-416FL]  19.56,72.64 180 top
Q52  20V/0.2A/8MHz/1.2Ω/1Vth  [SOT-416FL]  15.88,72.64 180 top
Q53  20V/0.2A/8MHz/1.2Ω/1Vth  [SOT-416FL]  23.62,72.64 180 top
Q54  20V/0.2A/8MHz/1.2Ω/1Vth  [SOT-416FL]  16.76,70.23 0 top
Q55  20V/0.2A/8MHz/1.2Ω/1Vth  [SOT-416FL]  22.35,68.33 180 top
Q56  20V/0.2A/8MHz/1.2Ω/1Vth  [SOT-416FL]  45.47,72.64 180 top
Q57  20V/0.2A/8MHz/1.2Ω/1Vth  [SOT-416FL]  41.78,72.64 180 top
Q58  20V/0.2A/8MHz/1.2Ω/1Vth  [SOT-416FL]  49.53,72.64 180 top
Q59  20V/0.2A/8MHz/1.2Ω/1Vth  [SOT-416FL]  42.67,70.23 0 top
Q60  20V/0.2A/8MHz/1.2Ω/1Vth  [SOT-416FL]  48.26,68.33 180 top
Q61  20V/0.2A/8MHz/1.2Ω/1Vth  [SOT-416FL]  71.37,72.64 180 top
Q62  20V/0.2A/8MHz/1.2Ω/1Vth  [SOT-416FL]  67.69,72.64 180 top
Q63  20V/0.2A/8MHz/1.2Ω/1Vth  [SOT-416FL]  75.44,72.64 180 top
Q64  20V/0.2A/8MHz/1.2Ω/1Vth  [SOT-416FL]  68.58,70.23 0 top
Q65  20V/0.2A/8MHz/1.2Ω/1Vth  [SOT-416FL]  74.17,68.33 180 top
Q66  20V/0.2A/8MHz/1.2Ω/1Vth  [SOT-416FL]  97.28,72.64 180 top
Q67  20V/0.2A/8MHz/1.2Ω/1Vth  [SOT-416FL]  93.6,72.64 180 top
Q68  20V/0.2A/8MHz/1.2Ω/1Vth  [SOT-416FL]  101.35,72.64 180 top
Q69  20V/0.2A/8MHz/1.2Ω/1Vth  [SOT-416FL]  94.49,70.23 0 top
Q70  20V/0.2A/8MHz/1.2Ω/1Vth  [SOT-416FL]  100.08,68.33 180 top
Q71  20V/0.2A/8MHz/1.2Ω/1Vth  [SOT-416FL]  123.19,72.64 180 top
Q72  20V/0.2A/8MHz/1.2Ω/1Vth  [SOT-416FL]  119.51,72.64 180 top
Q73  20V/0.2A/8MHz/1.2Ω/1Vth  [SOT-416FL]  127.25,72.64 180 top
Q74  20V/0.2A/8MHz/1.2Ω/1Vth  [SOT-416FL]  120.4,70.23 0 top
Q75  20V/0.2A/8MHz/1.2Ω/1Vth  [SOT-416FL]  125.98,68.33 180 top
Q76  20V/0.2A/8MHz/1.2Ω/1Vth  [SOT-416FL]  19.56,98.55 180 top
Q77  20V/0.2A/8MHz/1.2Ω/1Vth  [SOT-416FL]  15.88,98.55 180 top
Q78  20V/0.2A/8MHz/1.2Ω/1Vth  [SOT-416FL]  23.62,98.55 180 top
Q79  20V/0.2A/8MHz/1.2Ω/1Vth  [SOT-416FL]  16.76,96.14 0 top
Q80  20V/0.2A/8MHz/1.2Ω/1Vth  [SOT-416FL]  22.35,94.23 180 top
Q81  20V/0.2A/8MHz/1.2Ω/1Vth  [SOT-416FL]  45.47,98.55 180 top
Q82  20V/0.2A/8MHz/1.2Ω/1Vth  [SOT-416FL]  41.78,98.55 180 top
Q83  20V/0.2A/8MHz/1.2Ω/1Vth  [SOT-416FL]  49.53,98.55 180 top
Q84  20V/0.2A/8MHz/1.2Ω/1Vth  [SOT-416FL]  42.67,96.14 0 top
Q85  20V/0.2A/8MHz/1.2Ω/1Vth  [SOT-416FL]  48.26,94.23 180 top
Q86  20V/0.2A/8MHz/1.2Ω/1Vth  [SOT-416FL]  71.37,98.55 180 top
Q87  20V/0.2A/8MHz/1.2Ω/1Vth  [SOT-416FL]  67.69,98.55 180 top
Q88  20V/0.2A/8MHz/1.2Ω/1Vth  [SOT-416FL]  75.44,98.55 180 top
Q89  20V/0.2A/8MHz/1.2Ω/1Vth  [SOT-416FL]  68.58,96.14 0 top
Q90  20V/0.2A/8MHz/1.2Ω/1Vth  [SOT-416FL]  74.17,94.23 180 top
Q91  20V/0.2A/8MHz/1.2Ω/1Vth  [SOT-416FL]  97.28,98.55 180 top
Q92  20V/0.2A/8MHz/1.2Ω/1Vth  [SOT-416FL]  93.6,98.55 180 top
Q93  20V/0.2A/8MHz/1.2Ω/1Vth  [SOT-416FL]  101.35,98.55 180 top
Q94  20V/0.2A/8MHz/1.2Ω/1Vth  [SOT-416FL]  94.49,96.14 0 top
Q95  20V/0.2A/8MHz/1.2Ω/1Vth  [SOT-416FL]  100.08,94.23 180 top
Q96  20V/0.2A/8MHz/1.2Ω/1Vth  [SOT-416FL]  123.19,98.55 180 top
Q97  20V/0.2A/8MHz/1.2Ω/1Vth  [SOT-416FL]  119.51,98.55 180 top
Q98  20V/0.2A/8MHz/1.2Ω/1Vth  [SOT-416FL]  127.25,98.55 180 top
Q99  20V/0.2A/8MHz/1.2Ω/1Vth  [SOT-416FL]  120.4,96.14 0 top
Q100  20V/0.2A/8MHz/1.2Ω/1Vth  [SOT-416FL]  125.98,94.23 180 top
Q101  20V/0.2A/8MHz/1.2Ω/1Vth  [SOT-416FL]  19.56,124.46 180 top
Q102  20V/0.2A/8MHz/1.2Ω/1Vth  [SOT-416FL]  15.88,124.46 180 top
Q103  20V/0.2A/8MHz/1.2Ω/1Vth  [SOT-416FL]  23.62,124.46 180 top
Q104  20V/0.2A/8MHz/1.2Ω/1Vth  [SOT-416FL]  16.76,122.05 0 top
Q105  20V/0.2A/8MHz/1.2Ω/1Vth  [SOT-416FL]  22.35,120.14 180 top
Q106  20V/0.2A/8MHz/1.2Ω/1Vth  [SOT-416FL]  45.47,124.46 180 top
Q107  20V/0.2A/8MHz/1.2Ω/1Vth  [SOT-416FL]  41.78,124.46 180 top
Q108  20V/0.2A/8MHz/1.2Ω/1Vth  [SOT-416FL]  49.53,124.46 180 top
Q109  20V/0.2A/8MHz/1.2Ω/1Vth  [SOT-416FL]  42.67,122.05 0 top
Q110  20V/0.2A/8MHz/1.2Ω/1Vth  [SOT-416FL]  48.26,120.14 180 top
Q111  20V/0.2A/8MHz/1.2Ω/1Vth  [SOT-416FL]  71.37,124.46 180 top
Q112  20V/0.2A/8MHz/1.2Ω/1Vth  [SOT-416FL]  67.69,124.46 180 top
Q113  20V/0.2A/8MHz/1.2Ω/1Vth  [SOT-416FL]  75.44,124.46 180 top
Q114  20V/0.2A/8MHz/1.2Ω/1Vth  [SOT-416FL]  68.58,122.05 0 top
Q115  20V/0.2A/8MHz/1.2Ω/1Vth  [SOT-416FL]  74.17,120.14 180 top
Q116  20V/0.2A/8MHz/1.2Ω/1Vth  [SOT-416FL]  97.28,124.46 180 top
Q117  20V/0.2A/8MHz/1.2Ω/1Vth  [SOT-416FL]  93.6,124.46 180 top
Q118  20V/0.2A/8MHz/1.2Ω/1Vth  [SOT-416FL]  101.35,124.46 180 top
Q119  20V/0.2A/8MHz/1.2Ω/1Vth  [SOT-416FL]  94.49,122.05 0 top
Q120  20V/0.2A/8MHz/1.2Ω/1Vth  [SOT-416FL]  100.08,120.14 180 top
Q121  20V/0.2A/8MHz/1.2Ω/1Vth  [SOT-416FL]  123.19,124.46 180 top
Q122  20V/0.2A/8MHz/1.2Ω/1Vth  [SOT-416FL]  119.51,124.46 180 top
Q123  20V/0.2A/8MHz/1.2Ω/1Vth  [SOT-416FL]  127.25,124.46 180 top
Q124  20V/0.2A/8MHz/1.2Ω/1Vth  [SOT-416FL]  120.4,122.05 0 top
Q125  20V/0.2A/8MHz/1.2Ω/1Vth  [SOT-416FL]  125.98,120.14 180 top
R1  1k  [0603]  10.67,24.64 0 top
R2  2.2k  [0402-TIGHT]  19.56,22.86 0 top
R3  2.2k  [0402-TIGHT]  17.98,21.34 90 top
R4  2.2k  [0402-TIGHT]  23.62,22.86 0 top
R5  2.2k  [0402-TIGHT]  22.05,21.34 90 top
R6  1k  [0603]  36.58,24.64 0 top
R7  2.2k  [0402-TIGHT]  41.78,22.86 0 top
R8  2.2k  [0402-TIGHT]  40.23,21.34 90 top
R9  2.2k  [0402-TIGHT]  42.67,16.38 180 top
R10  2.2k  [0402-TIGHT]  15.88,22.86 0 top
R11  2.2k  [0402-TIGHT]  14.33,21.34 90 top
R12  2.2k  [0402-TIGHT]  44.2,16.89 270 top
R13  2.2k  [0402-TIGHT]  48.26,18.54 0 top
R14  2.2k  [0402-TIGHT]  16.76,16.38 180 top
R15  2.2k  [0402-TIGHT]  18.29,16.89 270 top
R16  2.2k  [0402-TIGHT]  22.35,18.54 0 top
R17  2.2k  [0402-TIGHT]  20.83,17.02 90 top
R18  2.2k  [0402-TIGHT]  46.74,17.02 90 top
R19  2.2k  [0402-TIGHT]  45.47,22.86 0 top
R20  2.2k  [0402-TIGHT]  43.89,21.34 90 top
R21  2.2k  [0402-TIGHT]  49.53,22.86 0 top
R22  2.2k  [0402-TIGHT]  47.96,21.34 90 top
R23  1k  [0603]  62.48,24.64 0 top
R24  2.2k  [0402-TIGHT]  67.69,22.86 0 top
R25  2.2k  [0402-TIGHT]  66.14,21.34 90 top
R26  2.2k  [0402-TIGHT]  68.58,16.38 180 top
R27  2.2k  [0402-TIGHT]  70.1,16.89 270 top
R28  2.2k  [0402-TIGHT]  74.17,18.54 0 top
R29  2.2k  [0402-TIGHT]  72.64,17.02 90 top
R30  2.2k  [0402-TIGHT]  71.37,22.86 0 top
R31  2.2k  [0402-TIGHT]  69.8,21.34 90 top
R32  2.2k  [0402-TIGHT]  75.44,22.86 0 top
R33  2.2k  [0402-TIGHT]  73.86,21.34 90 top
R34  1k  [0603]  88.39,24.64 0 top
R35  2.2k  [0402-TIGHT]  93.6,22.86 0 top
R36  2.2k  [0402-TIGHT]  92.05,21.34 90 top
R37  2.2k  [0402-TIGHT]  94.49,16.38 180 top
R38  2.2k  [0402-TIGHT]  96.01,16.89 270 top
R39  2.2k  [0402-TIGHT]  100.08,18.54 0 top
R40  2.2k  [0402-TIGHT]  98.55,17.02 90 top
R41  2.2k  [0402-TIGHT]  97.28,22.86 0 top
R42  2.2k  [0402-TIGHT]  95.71,21.34 90 top
R43  2.2k  [0402-TIGHT]  101.35,22.86 0 top
R44  2.2k  [0402-TIGHT]  99.77,21.34 90 top
R45  1k  [0603]  114.3,24.64 0 top
R46  2.2k  [0402-TIGHT]  119.51,22.86 0 top
R47  2.2k  [0402-TIGHT]  117.96,21.34 90 top
R48  2.2k  [0402-TIGHT]  120.4,16.38 180 top
R49  2.2k  [0402-TIGHT]  121.92,16.89 270 top
R50  2.2k  [0402-TIGHT]  125.98,18.54 0 top
R51  2.2k  [0402-TIGHT]  124.46,17.02 90 top
R52  2.2k  [0402-TIGHT]  123.19,22.86 0 top
R53  2.2k  [0402-TIGHT]  121.62,21.34 90 top
R54  2.2k  [0402-TIGHT]  127.25,22.86 0 top
R55  2.2k  [0402-TIGHT]  125.68,21.34 90 top
R56  1k  [0603]  10.67,50.55 0 top
R57  2.2k  [0402-TIGHT]  15.88,48.77 0 top
R58  2.2k  [0402-TIGHT]  14.33,47.24 90 top
R59  2.2k  [0402-TIGHT]  16.76,42.29 180 top
R60  2.2k  [0402-TIGHT]  18.29,42.8 270 top
R61  2.2k  [0402-TIGHT]  22.35,44.45 0 top
R62  2.2k  [0402-TIGHT]  20.83,42.93 90 top
R63  2.2k  [0402-TIGHT]  19.56,48.77 0 top
R64  2.2k  [0402-TIGHT]  17.98,47.24 90 top
R65  2.2k  [0402-TIGHT]  23.62,48.77 0 top
R66  2.2k  [0402-TIGHT]  22.05,47.24 90 top
R67  1k  [0603]  36.58,50.55 0 top
R68  2.2k  [0402-TIGHT]  41.78,48.77 0 top
R69  2.2k  [0402-TIGHT]  40.23,47.24 90 top
R70  2.2k  [0402-TIGHT]  42.67,42.29 180 top
R71  2.2k  [0402-TIGHT]  44.2,42.8 270 top
R72  2.2k  [0402-TIGHT]  48.26,44.45 0 top
R73  2.2k  [0402-TIGHT]  46.74,42.93 90 top
R74  2.2k  [0402-TIGHT]  45.47,48.77 0 top
R75  2.2k  [0402-TIGHT]  43.89,47.24 90 top
R76  2.2k  [0402-TIGHT]  49.53,48.77 0 top
R77  2.2k  [0402-TIGHT]  47.96,47.24 90 top
R78  1k  [0603]  62.48,50.55 0 top
R79  2.2k  [0402-TIGHT]  67.69,48.77 0 top
R80  2.2k  [0402-TIGHT]  66.14,47.24 90 top
R81  2.2k  [0402-TIGHT]  68.58,42.29 180 top
R82  2.2k  [0402-TIGHT]  70.1,42.8 270 top
R83  2.2k  [0402-TIGHT]  74.17,44.45 0 top
R84  2.2k  [0402-TIGHT]  72.64,42.93 90 top
R85  2.2k  [0402-TIGHT]  71.37,48.77 0 top
R86  2.2k  [0402-TIGHT]  69.8,47.24 90 top
R87  2.2k  [0402-TIGHT]  75.44,48.77 0 top
R88  2.2k  [0402-TIGHT]  73.86,47.24 90 top
R89  1k  [0603]  88.39,50.55 0 top
R90  2.2k  [0402-TIGHT]  93.6,48.77 0 top
R91  2.2k  [0402-TIGHT]  92.05,47.24 90 top
R92  2.2k  [0402-TIGHT]  94.49,42.29 180 top
R93  2.2k  [0402-TIGHT]  96.01,42.8 270 top
R94  2.2k  [0402-TIGHT]  100.08,44.45 0 top
R95  2.2k  [0402-TIGHT]  98.55,42.93 90 top
R96  2.2k  [0402-TIGHT]  97.28,48.77 0 top
R97  2.2k  [0402-TIGHT]  95.71,47.24 90 top
R98  2.2k  [0402-TIGHT]  101.35,48.77 0 top
R99  2.2k  [0402-TIGHT]  99.77,47.24 90 top
R100  1k  [0603]  114.3,50.55 0 top
R101  2.2k  [0402-TIGHT]  119.51,48.77 0 top
R102  2.2k  [0402-TIGHT]  117.96,47.24 90 top
R103  2.2k  [0402-TIGHT]  120.4,42.29 180 top
R104  2.2k  [0402-TIGHT]  121.92,42.8 270 top
R105  2.2k  [0402-TIGHT]  125.98,44.45 0 top
R106  2.2k  [0402-TIGHT]  124.46,42.93 90 top
R107  2.2k  [0402-TIGHT]  123.19,48.77 0 top
R108  2.2k  [0402-TIGHT]  121.62,47.24 90 top
R109  2.2k  [0402-TIGHT]  127.25,48.77 0 top
R110  2.2k  [0402-TIGHT]  125.68,47.24 90 top
R111  1k  [0603]  10.67,76.45 0 top
R112  2.2k  [0402-TIGHT]  15.88,74.68 0 top
R113  2.2k  [0402-TIGHT]  14.33,73.15 90 top
R114  2.2k  [0402-TIGHT]  16.76,68.2 180 top
R115  2.2k  [0402-TIGHT]  18.29,68.71 270 top
R116  2.2k  [0402-TIGHT]  22.35,70.36 0 top
R117  2.2k  [0402-TIGHT]  20.83,68.83 90 top
R118  2.2k  [0402-TIGHT]  19.56,74.68 0 top
R119  2.2k  [0402-TIGHT]  17.98,73.15 90 top
R120  2.2k  [0402-TIGHT]  23.62,74.68 0 top
R121  2.2k  [0402-TIGHT]  22.05,73.15 90 top
R122  1k  [0603]  36.58,76.45 0 top
R123  2.2k  [0402-TIGHT]  41.78,74.68 0 top
R124  2.2k  [0402-TIGHT]  40.23,73.15 90 top
R125  2.2k  [0402-TIGHT]  42.67,68.2 180 top
R126  2.2k  [0402-TIGHT]  44.2,68.71 270 top
R127  2.2k  [0402-TIGHT]  48.26,70.36 0 top
R128  2.2k  [0402-TIGHT]  46.74,68.83 90 top
R129  2.2k  [0402-TIGHT]  45.47,74.68 0 top
R130  2.2k  [0402-TIGHT]  43.89,73.15 90 top
R131  2.2k  [0402-TIGHT]  49.53,74.68 0 top
R132  2.2k  [0402-TIGHT]  47.96,73.15 90 top
R133  1k  [0603]  62.48,76.45 0 top
R134  2.2k  [0402-TIGHT]  67.69,74.68 0 top
R135  2.2k  [0402-TIGHT]  66.14,73.15 90 top
R136  2.2k  [0402-TIGHT]  68.58,68.2 180 top
R137  2.2k  [0402-TIGHT]  70.1,68.71 270 top
R138  2.2k  [0402-TIGHT]  74.17,70.36 0 top
R139  2.2k  [0402-TIGHT]  72.64,68.83 90 top
R140  2.2k  [0402-TIGHT]  71.37,74.68 0 top
R141  2.2k  [0402-TIGHT]  69.8,73.15 90 top
R142  2.2k  [0402-TIGHT]  75.44,74.68 0 top
R143  2.2k  [0402-TIGHT]  73.86,73.15 90 top
R144  1k  [0603]  88.39,76.45 0 top
R145  2.2k  [0402-TIGHT]  93.6,74.68 0 top
R146  2.2k  [0402-TIGHT]  92.05,73.15 90 top
R147  2.2k  [0402-TIGHT]  94.49,68.2 180 top
R148  2.2k  [0402-TIGHT]  96.01,68.71 270 top
R149  2.2k  [0402-TIGHT]  100.08,70.36 0 top
R150  2.2k  [0402-TIGHT]  98.55,68.83 90 top
R151  2.2k  [0402-TIGHT]  97.28,74.68 0 top
R152  2.2k  [0402-TIGHT]  95.71,73.15 90 top
R153  2.2k  [0402-TIGHT]  101.35,74.68 0 top
R154  2.2k  [0402-TIGHT]  99.77,73.15 90 top
R155  1k  [0603]  114.3,76.45 0 top
R156  2.2k  [0402-TIGHT]  119.51,74.68 0 top
R157  2.2k  [0402-TIGHT]  117.96,73.15 90 top
R158  2.2k  [0402-TIGHT]  120.4,68.2 180 top
R159  2.2k  [0402-TIGHT]  121.92,68.71 270 top
R160  2.2k  [0402-TIGHT]  125.98,70.36 0 top
R161  2.2k  [0402-TIGHT]  124.46,68.83 90 top
R162  2.2k  [0402-TIGHT]  123.19,74.68 0 top
R163  2.2k  [0402-TIGHT]  121.62,73.15 90 top
R164  2.2k  [0402-TIGHT]  127.25,74.68 0 top
R165  2.2k  [0402-TIGHT]  125.68,73.15 90 top
R166  1k  [0603]  10.67,102.36 0 top
R167  2.2k  [0402-TIGHT]  15.88,100.58 0 top
R168  2.2k  [0402-TIGHT]  14.33,99.06 90 top
R169  2.2k  [0402-TIGHT]  16.76,94.11 180 top
R170  2.2k  [0402-TIGHT]  18.29,94.62 270 top
R171  2.2k  [0402-TIGHT]  22.35,96.27 0 top
R172  2.2k  [0402-TIGHT]  20.83,94.74 90 top
R173  2.2k  [0402-TIGHT]  19.56,100.58 0 top
R174  2.2k  [0402-TIGHT]  17.98,99.06 90 top
R175  2.2k  [0402-TIGHT]  23.62,100.58 0 top
R176  2.2k  [0402-TIGHT]  22.05,99.06 90 top
R177  1k  [0603]  36.58,102.36 0 top
R178  2.2k  [0402-TIGHT]  41.78,100.58 0 top
R179  2.2k  [0402-TIGHT]  40.23,99.06 90 top
R180  2.2k  [0402-TIGHT]  42.67,94.11 180 top
R181  2.2k  [0402-TIGHT]  44.2,94.62 270 top
R182  2.2k  [0402-TIGHT]  48.26,96.27 0 top
R183  2.2k  [0402-TIGHT]  46.74,94.74 90 top
R184  2.2k  [0402-TIGHT]  45.47,100.58 0 top
R185  2.2k  [0402-TIGHT]  43.89,99.06 90 top
R186  2.2k  [0402-TIGHT]  49.53,100.58 0 top
R187  2.2k  [0402-TIGHT]  47.96,99.06 90 top
R188  1k  [0603]  62.48,102.36 0 top
R189  2.2k  [0402-TIGHT]  67.69,100.58 0 top
R190  2.2k  [0402-TIGHT]  66.14,99.06 90 top
R191  2.2k  [0402-TIGHT]  68.58,94.11 180 top
R192  2.2k  [0402-TIGHT]  70.1,94.62 270 top
R193  2.2k  [0402-TIGHT]  74.17,96.27 0 top
R194  2.2k  [0402-TIGHT]  72.64,94.74 90 top
R195  2.2k  [0402-TIGHT]  71.37,100.58 0 top
R196  2.2k  [0402-TIGHT]  69.8,99.06 90 top
R197  2.2k  [0402-TIGHT]  75.44,100.58 0 top
R198  2.2k  [0402-TIGHT]  73.86,99.06 90 top
R199  1k  [0603]  88.39,102.36 0 top
R200  2.2k  [0402-TIGHT]  93.6,100.58 0 top
R201  2.2k  [0402-TIGHT]  92.05,99.06 90 top
R202  2.2k  [0402-TIGHT]  94.49,94.11 180 top
R203  2.2k  [0402-TIGHT]  96.01,94.62 270 top
R204  2.2k  [0402-TIGHT]  100.08,96.27 0 top
R205  2.2k  [0402-TIGHT]  98.55,94.74 90 top
R206  2.2k  [0402-TIGHT]  97.28,100.58 0 top
R207  2.2k  [0402-TIGHT]  95.71,99.06 90 top
R208  2.2k  [0402-TIGHT]  101.35,100.58 0 top
R209  2.2k  [0402-TIGHT]  99.77,99.06 90 top
R210  1k  [0603]  114.3,102.36 0 top
R211  2.2k  [0402-TIGHT]  119.51,100.58 0 top
R212  2.2k  [0402-TIGHT]  117.96,99.06 90 top
R213  2.2k  [0402-TIGHT]  120.4,94.11 180 top
R214  2.2k  [0402-TIGHT]  121.92,94.62 270 top
R215  2.2k  [0402-TIGHT]  125.98,96.27 0 top
R216  2.2k  [0402-TIGHT]  124.46,94.74 90 top
R217  2.2k  [0402-TIGHT]  123.19,100.58 0 top
R218  2.2k  [0402-TIGHT]  121.62,99.06 90 top
R219  2.2k  [0402-TIGHT]  127.25,100.58 0 top
R220  2.2k  [0402-TIGHT]  125.68,99.06 90 top
R221  1k  [0603]  10.67,128.27 0 top
R222  2.2k  [0402-TIGHT]  15.88,126.49 0 top
R223  2.2k  [0402-TIGHT]  14.33,124.97 90 top
R224  2.2k  [0402-TIGHT]  16.76,120.02 180 top
R225  2.2k  [0402-TIGHT]  18.29,120.52 270 top
R226  2.2k  [0402-TIGHT]  22.35,122.17 0 top
R227  2.2k  [0402-TIGHT]  20.83,120.65 90 top
R228  2.2k  [0402-TIGHT]  19.56,126.49 0 top
R229  2.2k  [0402-TIGHT]  17.98,124.97 90 top
R230  2.2k  [0402-TIGHT]  23.62,126.49 0 top
R231  2.2k  [0402-TIGHT]  22.05,124.97 90 top
R232  1k  [0603]  36.58,128.27 0 top
R233  2.2k  [0402-TIGHT]  41.78,126.49 0 top
R234  2.2k  [0402-TIGHT]  40.23,124.97 90 top
R235  2.2k  [0402-TIGHT]  42.67,120.02 180 top
R236  2.2k  [0402-TIGHT]  44.2,120.52 270 top
R237  2.2k  [0402-TIGHT]  48.26,122.17 0 top
R238  2.2k  [0402-TIGHT]  46.74,120.65 90 top
R239  2.2k  [0402-TIGHT]  45.47,126.49 0 top
R240  2.2k  [0402-TIGHT]  43.89,124.97 90 top
R241  2.2k  [0402-TIGHT]  49.53,126.49 0 top
R242  2.2k  [0402-TIGHT]  47.96,124.97 90 top
R243  1k  [0603]  62.48,128.27 0 top
R244  2.2k  [0402-TIGHT]  67.69,126.49 0 top
R245  2.2k  [0402-TIGHT]  66.14,124.97 90 top
R246  2.2k  [0402-TIGHT]  68.58,120.02 180 top
R247  2.2k  [0402-TIGHT]  70.1,120.52 270 top
R248  2.2k  [0402-TIGHT]  74.17,122.17 0 top
R249  2.2k  [0402-TIGHT]  72.64,120.65 90 top
R250  2.2k  [0402-TIGHT]  71.37,126.49 0 top
R251  2.2k  [0402-TIGHT]  69.8,124.97 90 top
R252  2.2k  [0402-TIGHT]  75.44,126.49 0 top
R253  2.2k  [0402-TIGHT]  73.86,124.97 90 top
R254  1k  [0603]  88.39,128.27 0 top
R255  2.2k  [0402-TIGHT]  93.6,126.49 0 top
R256  2.2k  [0402-TIGHT]  92.05,124.97 90 top
R257  2.2k  [0402-TIGHT]  94.49,120.02 180 top
R258  2.2k  [0402-TIGHT]  96.01,120.52 270 top
R259  2.2k  [0402-TIGHT]  100.08,122.17 0 top
R260  2.2k  [0402-TIGHT]  98.55,120.65 90 top
R261  2.2k  [0402-TIGHT]  97.28,126.49 0 top
R262  2.2k  [0402-TIGHT]  95.71,124.97 90 top
R263  2.2k  [0402-TIGHT]  101.35,126.49 0 top
R264  2.2k  [0402-TIGHT]  99.77,124.97 90 top
R265  1k  [0603]  114.3,128.27 0 top
R266  2.2k  [0402-TIGHT]  119.51,126.49 0 top
R267  2.2k  [0402-TIGHT]  117.96,124.97 90 top
R268  2.2k  [0402-TIGHT]  120.4,120.02 180 top
R269  2.2k  [0402-TIGHT]  121.92,120.52 270 top
R270  2.2k  [0402-TIGHT]  125.98,122.17 0 top
R271  2.2k  [0402-TIGHT]  124.46,120.65 90 top
R272  2.2k  [0402-TIGHT]  123.19,126.49 0 top
R273  2.2k  [0402-TIGHT]  121.62,124.97 90 top
R274  2.2k  [0402-TIGHT]  127.25,126.49 0 top
R275  2.2k  [0402-TIGHT]  125.68,124.97 90 top
U1  AP2127K-1.8V  [SOT23-5]  13.18,12.98 270 top
U2  AP2127K-1.8V  [SOT23-5]  39.09,12.98 270 top
U3  AP2127K-1.8V  [SOT23-5]  65,12.98 270 top
U4  AP2127K-1.8V  [SOT23-5]  90.91,12.98 270 top
U5  AP2127K-1.8V  [SOT23-5]  116.81,12.98 270 top
U6  AP2127K-1.8V  [SOT23-5]  13.18,38.89 270 top
U7  AP2127K-1.8V  [SOT23-5]  39.09,38.89 270 top
U8  AP2127K-1.8V  [SOT23-5]  65,38.89 270 top
U9  AP2127K-1.8V  [SOT23-5]  90.91,38.89 270 top
U10  AP2127K-1.8V  [SOT23-5]  116.81,38.89 270 top
U11  AP2127K-1.8V  [SOT23-5]  13.18,64.8 270 top
U12  AP2127K-1.8V  [SOT23-5]  39.09,64.8 270 top
U13  AP2127K-1.8V  [SOT23-5]  65,64.8 270 top
U14  AP2127K-1.8V  [SOT23-5]  90.91,64.8 270 top
U15  AP2127K-1.8V  [SOT23-5]  116.81,64.8 270 top
U16  AP2127K-1.8V  [SOT23-5]  13.18,90.7 270 top
U17  AP2127K-1.8V  [SOT23-5]  39.09,90.7 270 top
U18  AP2127K-1.8V  [SOT23-5]  65,90.7 270 top
U19  AP2127K-1.8V  [SOT23-5]  90.91,90.7 270 top
U20  AP2127K-1.8V  [SOT23-5]  116.81,90.7 270 top
U21  AP2127K-1.8V  [SOT23-5]  13.18,116.61 270 top
U22  AP2127K-1.8V  [SOT23-5]  39.09,116.61 270 top
U23  AP2127K-1.8V  [SOT23-5]  65,116.61 270 top
U24  AP2127K-1.8V  [SOT23-5]  90.91,116.61 270 top
U25  AP2127K-1.8V  [SOT23-5]  116.81,116.61 270 top
U$1  MOD-CH101_CONNECTOR  [FPC_MOLEX5034800800]  19.56,25.91 180 top
U$2  QWIIC_BOARD_OUTLINEH  [QWIIC_BOARD_MOUNT_HOLES]  19.56,19.56 0 top
U$3  [#_3V3#1]  18.29,8.13 90 top
U$4  [#_GND#0]  15.75,8.13 90 top
U$5  [#_SDA#2]  20.83,8.13 90 top
U$6  [#_SCL#3]  23.37,8.13 90 top
U$7  [QWIIC_CHIRP_1017]  27.18,23.37 0 bottom
U$8  [ULTRASONIC_RANGEFINDER8]  31.12,21.56 0 bottom
U$9  [#I�C#1019]  20.9,18.64 0 bottom
U$10  [#LED#1018]  12.27,26.26 0 bottom
U$11  [#_SCL#3]  23.37,8.13 90 bottom
U$12  [#_SDA#2]  20.83,8.13 90 bottom
U$13  [#_3V3#1]  18.29,8.13 90 bottom
U$14  [#_GND#0]  15.75,8.13 90 bottom
U$15  [##INT_##0]  17.02,26.67 90 bottom
U$16  [##RST_##1]  22.1,26.29 90 bottom
U$17  [#PROG_#5]  19.56,25.15 90 bottom
U$18  [SPARKX-SMALL]  19.56,14.48 0 bottom
U$19  [QWIIC_COPYRIGHT_SMALL]  28.45,24.64 0 top
U$20  [PWR0]  9.14,27.3 0 top
U$21  MOD-CH101_CONNECTOR  [FPC_MOLEX5034800800]  45.47,25.91 180 top
U$22  QWIIC_BOARD_OUTLINEH  [QWIIC_BOARD_MOUNT_HOLES]  45.47,19.56 0 top
U$23  [#_3V3#1]  44.2,8.13 90 top
U$24  [#_GND#0]  41.66,8.13 90 top
U$25  [#_SDA#2]  46.74,8.13 90 top
U$26  [#_SCL#3]  49.28,8.13 90 top
U$27  [QWIIC_CHIRP_1017]  53.09,23.37 0 bottom
U$28  [ULTRASONIC_RANGEFINDER8]  57.02,21.56 0 bottom
U$29  [#I�C#1019]  46.81,18.64 0 bottom
U$30  [#LED#1018]  38.18,26.26 0 bottom
U$31  [#_SCL#3]  49.28,8.13 90 bottom
U$32  [#_SDA#2]  46.74,8.13 90 bottom
U$33  [#_3V3#1]  44.2,8.13 90 bottom
U$34  [#_GND#0]  41.66,8.13 90 bottom
U$35  [##INT_##0]  42.93,26.67 90 bottom
U$36  [##RST_##1]  48.01,26.29 90 bottom
U$37  [#PROG_#5]  45.47,25.15 90 bottom
U$38  [SPARKX-SMALL]  45.47,14.48 0 bottom
U$39  [QWIIC_COPYRIGHT_SMALL]  54.36,24.64 0 top
U$40  [PWR0]  35.05,27.3 0 top
U$41  MOD-CH101_CONNECTOR  [FPC_MOLEX5034800800]  71.37,25.91 180 top
U$42  QWIIC_BOARD_OUTLINEH  [QWIIC_BOARD_MOUNT_HOLES]  71.37,19.56 0 top
U$43  [#_3V3#1]  70.1,8.13 90 top
U$44  [#_GND#0]  67.56,8.13 90 top
U$45  [#_SDA#2]  72.64,8.13 90 top
U$46  [#_SCL#3]  75.18,8.13 90 top
U$47  [QWIIC_CHIRP_1017]  78.99,23.37 0 bottom
U$48  [ULTRASONIC_RANGEFINDER8]  82.93,21.56 0 bottom
U$49  [#I�C#1019]  72.72,18.64 0 bottom
U$50  [#LED#1018]  64.08,26.26 0 bottom
U$51  [#_SCL#3]  75.18,8.13 90 bottom
U$52  [#_SDA#2]  72.64,8.13 90 bottom
U$53  [#_3V3#1]  70.1,8.13 90 bottom
U$54  [#_GND#0]  67.56,8.13 90 bottom
U$55  [##INT_##0]  68.83,26.67 90 bottom
U$56  [##RST_##1]  73.91,26.29 90 bottom
U$57  [#PROG_#5]  71.37,25.15 90 bottom
U$58  [SPARKX-SMALL]  71.37,14.48 0 bottom
U$59  [QWIIC_COPYRIGHT_SMALL]  80.26,24.64 0 top
U$60  [PWR0]  60.96,27.3 0 top
U$61  MOD-CH101_CONNECTOR  [FPC_MOLEX5034800800]  97.28,25.91 180 top
U$62  QWIIC_BOARD_OUTLINEH  [QWIIC_BOARD_MOUNT_HOLES]  97.28,19.56 0 top
U$63  [#_3V3#1]  96.01,8.13 90 top
U$64  [#_GND#0]  93.47,8.13 90 top
U$65  [#_SDA#2]  98.55,8.13 90 top
U$66  [#_SCL#3]  101.09,8.13 90 top
U$67  [QWIIC_CHIRP_1017]  104.9,23.37 0 bottom
U$68  [ULTRASONIC_RANGEFINDER8]  108.84,21.56 0 bottom
U$69  [#I�C#1019]  98.63,18.64 0 bottom
U$70  [#LED#1018]  89.99,26.26 0 bottom
U$71  [#_SCL#3]  101.09,8.13 90 bottom
U$72  [#_SDA#2]  98.55,8.13 90 bottom
U$73  [#_3V3#1]  96.01,8.13 90 bottom
U$74  [#_GND#0]  93.47,8.13 90 bottom
U$75  [##INT_##0]  94.74,26.67 90 bottom
U$76  [##RST_##1]  99.82,26.29 90 bottom
U$77  [#PROG_#5]  97.28,25.15 90 bottom
U$78  [SPARKX-SMALL]  97.28,14.48 0 bottom
U$79  [QWIIC_COPYRIGHT_SMALL]  106.17,24.64 0 top
U$80  [PWR0]  86.87,27.3 0 top
U$81  MOD-CH101_CONNECTOR  [FPC_MOLEX5034800800]  123.19,25.91 180 top
U$82  QWIIC_BOARD_OUTLINEH  [QWIIC_BOARD_MOUNT_HOLES]  123.19,19.56 0 top
U$83  [#_3V3#1]  121.92,8.13 90 top
U$84  [#_GND#0]  119.38,8.13 90 top
U$85  [#_SDA#2]  124.46,8.13 90 top
U$86  [#_SCL#3]  127,8.13 90 top
U$87  [QWIIC_CHIRP_1017]  130.81,23.37 0 bottom
U$88  [ULTRASONIC_RANGEFINDER8]  134.75,21.56 0 bottom
U$89  [#I�C#1019]  124.54,18.64 0 bottom
U$90  [#LED#1018]  115.9,26.26 0 bottom
U$91  [#_SCL#3]  127,8.13 90 bottom
U$92  [#_SDA#2]  124.46,8.13 90 bottom
U$93  [#_3V3#1]  121.92,8.13 90 bottom
U$94  [#_GND#0]  119.38,8.13 90 bottom
U$95  [##INT_##0]  120.65,26.67 90 bottom
U$96  [##RST_##1]  125.73,26.29 90 bottom
U$97  [#PROG_#5]  123.19,25.15 90 bottom
U$98  [SPARKX-SMALL]  123.19,14.48 0 bottom
U$99  [QWIIC_COPYRIGHT_SMALL]  132.08,24.64 0 top
U$100  [PWR0]  112.78,27.3 0 top
U$101  MOD-CH101_CONNECTOR  [FPC_MOLEX5034800800]  19.56,51.82 180 top
U$102  QWIIC_BOARD_OUTLINEH  [QWIIC_BOARD_MOUNT_HOLES]  19.56,45.47 0 top
U$103  [#_3V3#1]  18.29,34.04 90 top
U$104  [#_GND#0]  15.75,34.04 90 top
U$105  [#_SDA#2]  20.83,34.04 90 top
U$106  [#_SCL#3]  23.37,34.04 90 top
U$107  [QWIIC_CHIRP_1017]  27.18,49.28 0 bottom
U$108  [ULTRASONIC_RANGEFINDER8]  31.12,47.47 0 bottom
U$109  [#I�C#1019]  20.9,44.55 0 bottom
U$110  [#LED#1018]  12.27,52.17 0 bottom
U$111  [#_SCL#3]  23.37,34.04 90 bottom
U$112  [#_SDA#2]  20.83,34.04 90 bottom
U$113  [#_3V3#1]  18.29,34.04 90 bottom
U$114  [#_GND#0]  15.75,34.04 90 bottom
U$115  [##INT_##0]  17.02,52.58 90 bottom
U$116  [##RST_##1]  22.1,52.2 90 bottom
U$117  [#PROG_#5]  19.56,51.05 90 bottom
U$118  [SPARKX-SMALL]  19.56,40.39 0 bottom
U$119  [QWIIC_COPYRIGHT_SMALL]  28.45,50.55 0 top
U$120  [PWR0]  9.14,53.21 0 top
U$121  MOD-CH101_CONNECTOR  [FPC_MOLEX5034800800]  45.47,51.82 180 top
U$122  QWIIC_BOARD_OUTLINEH  [QWIIC_BOARD_MOUNT_HOLES]  45.47,45.47 0 top
U$123  [#_3V3#1]  44.2,34.04 90 top
U$124  [#_GND#0]  41.66,34.04 90 top
U$125  [#_SDA#2]  46.74,34.04 90 top
U$126  [#_SCL#3]  49.28,34.04 90 top
U$127  [QWIIC_CHIRP_1017]  53.09,49.28 0 bottom
U$128  [ULTRASONIC_RANGEFINDER8]  57.02,47.47 0 bottom
U$129  [#I�C#1019]  46.81,44.55 0 bottom
U$130  [#LED#1018]  38.18,52.17 0 bottom
U$131  [#_SCL#3]  49.28,34.04 90 bottom
U$132  [#_SDA#2]  46.74,34.04 90 bottom
U$133  [#_3V3#1]  44.2,34.04 90 bottom
U$134  [#_GND#0]  41.66,34.04 90 bottom
U$135  [##INT_##0]  42.93,52.58 90 bottom
U$136  [##RST_##1]  48.01,52.2 90 bottom
U$137  [#PROG_#5]  45.47,51.05 90 bottom
U$138  [SPARKX-SMALL]  45.47,40.39 0 bottom
U$139  [QWIIC_COPYRIGHT_SMALL]  54.36,50.55 0 top
U$140  [PWR0]  35.05,53.21 0 top
U$141  MOD-CH101_CONNECTOR  [FPC_MOLEX5034800800]  71.37,51.82 180 top
U$142  QWIIC_BOARD_OUTLINEH  [QWIIC_BOARD_MOUNT_HOLES]  71.37,45.47 0 top
U$143  [#_3V3#1]  70.1,34.04 90 top
U$144  [#_GND#0]  67.56,34.04 90 top
U$145  [#_SDA#2]  72.64,34.04 90 top
U$146  [#_SCL#3]  75.18,34.04 90 top
U$147  [QWIIC_CHIRP_1017]  78.99,49.28 0 bottom
U$148  [ULTRASONIC_RANGEFINDER8]  82.93,47.47 0 bottom
U$149  [#I�C#1019]  72.72,44.55 0 bottom
U$150  [#LED#1018]  64.08,52.17 0 bottom
U$151  [#_SCL#3]  75.18,34.04 90 bottom
U$152  [#_SDA#2]  72.64,34.04 90 bottom
U$153  [#_3V3#1]  70.1,34.04 90 bottom
U$154  [#_GND#0]  67.56,34.04 90 bottom
U$155  [##INT_##0]  68.83,52.58 90 bottom
U$156  [##RST_##1]  73.91,52.2 90 bottom
U$157  [#PROG_#5]  71.37,51.05 90 bottom
U$158  [SPARKX-SMALL]  71.37,40.39 0 bottom
U$159  [QWIIC_COPYRIGHT_SMALL]  80.26,50.55 0 top
U$160  [PWR0]  60.96,53.21 0 top
U$161  MOD-CH101_CONNECTOR  [FPC_MOLEX5034800800]  97.28,51.82 180 top
U$162  QWIIC_BOARD_OUTLINEH  [QWIIC_BOARD_MOUNT_HOLES]  97.28,45.47 0 top
U$163  [#_3V3#1]  96.01,34.04 90 top
U$164  [#_GND#0]  93.47,34.04 90 top
U$165  [#_SDA#2]  98.55,34.04 90 top
U$166  [#_SCL#3]  101.09,34.04 90 top
U$167  [QWIIC_CHIRP_1017]  104.9,49.28 0 bottom
U$168  [ULTRASONIC_RANGEFINDER8]  108.84,47.47 0 bottom
U$169  [#I�C#1019]  98.63,44.55 0 bottom
U$170  [#LED#1018]  89.99,52.17 0 bottom
U$171  [#_SCL#3]  101.09,34.04 90 bottom
U$172  [#_SDA#2]  98.55,34.04 90 bottom
U$173  [#_3V3#1]  96.01,34.04 90 bottom
U$174  [#_GND#0]  93.47,34.04 90 bottom
U$175  [##INT_##0]  94.74,52.58 90 bottom
U$176  [##RST_##1]  99.82,52.2 90 bottom
U$177  [#PROG_#5]  97.28,51.05 90 bottom
U$178  [SPARKX-SMALL]  97.28,40.39 0 bottom
U$179  [QWIIC_COPYRIGHT_SMALL]  106.17,50.55 0 top
U$180  [PWR0]  86.87,53.21 0 top
U$181  MOD-CH101_CONNECTOR  [FPC_MOLEX5034800800]  123.19,51.82 180 top
U$182  QWIIC_BOARD_OUTLINEH  [QWIIC_BOARD_MOUNT_HOLES]  123.19,45.47 0 top
U$183  [#_3V3#1]  121.92,34.04 90 top
U$184  [#_GND#0]  119.38,34.04 90 top
U$185  [#_SDA#2]  124.46,34.04 90 top
U$186  [#_SCL#3]  127,34.04 90 top
U$187  [QWIIC_CHIRP_1017]  130.81,49.28 0 bottom
U$188  [ULTRASONIC_RANGEFINDER8]  134.75,47.47 0 bottom
U$189  [#I�C#1019]  124.54,44.55 0 bottom
U$190  [#LED#1018]  115.9,52.17 0 bottom
U$191  [#_SCL#3]  127,34.04 90 bottom
U$192  [#_SDA#2]  124.46,34.04 90 bottom
U$193  [#_3V3#1]  121.92,34.04 90 bottom
U$194  [#_GND#0]  119.38,34.04 90 bottom
U$195  [##INT_##0]  120.65,52.58 90 bottom
U$196  [##RST_##1]  125.73,52.2 90 bottom
U$197  [#PROG_#5]  123.19,51.05 90 bottom
U$198  [SPARKX-SMALL]  123.19,40.39 0 bottom
U$199  [QWIIC_COPYRIGHT_SMALL]  132.08,50.55 0 top
U$200  [PWR0]  112.78,53.21 0 top
U$201  MOD-CH101_CONNECTOR  [FPC_MOLEX5034800800]  19.56,77.72 180 top
U$202  QWIIC_BOARD_OUTLINEH  [QWIIC_BOARD_MOUNT_HOLES]  19.56,71.37 0 top
U$203  [#_3V3#1]  18.29,59.94 90 top
U$204  [#_GND#0]  15.75,59.94 90 top
U$205  [#_SDA#2]  20.83,59.94 90 top
U$206  [#_SCL#3]  23.37,59.94 90 top
U$207  [QWIIC_CHIRP_1017]  27.18,75.18 0 bottom
U$208  [ULTRASONIC_RANGEFINDER8]  31.12,73.38 0 bottom
U$209  [#I�C#1019]  20.9,70.46 0 bottom
U$210  [#LED#1018]  12.27,78.08 0 bottom
U$211  [#_SCL#3]  23.37,59.94 90 bottom
U$212  [#_SDA#2]  20.83,59.94 90 bottom
U$213  [#_3V3#1]  18.29,59.94 90 bottom
U$214  [#_GND#0]  15.75,59.94 90 bottom
U$215  [##INT_##0]  17.02,78.49 90 bottom
U$216  [##RST_##1]  22.1,78.11 90 bottom
U$217  [#PROG_#5]  19.56,76.96 90 bottom
U$218  [SPARKX-SMALL]  19.56,66.29 0 bottom
U$219  [QWIIC_COPYRIGHT_SMALL]  28.45,76.45 0 top
U$220  [PWR0]  9.14,79.12 0 top
U$221  MOD-CH101_CONNECTOR  [FPC_MOLEX5034800800]  45.47,77.72 180 top
U$222  QWIIC_BOARD_OUTLINEH  [QWIIC_BOARD_MOUNT_HOLES]  45.47,71.37 0 top
U$223  [#_3V3#1]  44.2,59.94 90 top
U$224  [#_GND#0]  41.66,59.94 90 top
U$225  [#_SDA#2]  46.74,59.94 90 top
U$226  [#_SCL#3]  49.28,59.94 90 top
U$227  [QWIIC_CHIRP_1017]  53.09,75.18 0 bottom
U$228  [ULTRASONIC_RANGEFINDER8]  57.02,73.38 0 bottom
U$229  [#I�C#1019]  46.81,70.46 0 bottom
U$230  [#LED#1018]  38.18,78.08 0 bottom
U$231  [#_SCL#3]  49.28,59.94 90 bottom
U$232  [#_SDA#2]  46.74,59.94 90 bottom
U$233  [#_3V3#1]  44.2,59.94 90 bottom
U$234  [#_GND#0]  41.66,59.94 90 bottom
U$235  [##INT_##0]  42.93,78.49 90 bottom
U$236  [##RST_##1]  48.01,78.11 90 bottom
U$237  [#PROG_#5]  45.47,76.96 90 bottom
U$238  [SPARKX-SMALL]  45.47,66.29 0 bottom
U$239  [QWIIC_COPYRIGHT_SMALL]  54.36,76.45 0 top
U$240  [PWR0]  35.05,79.12 0 top
U$241  MOD-CH101_CONNECTOR  [FPC_MOLEX5034800800]  71.37,77.72 180 top
U$242  QWIIC_BOARD_OUTLINEH  [QWIIC_BOARD_MOUNT_HOLES]  71.37,71.37 0 top
U$243  [#_3V3#1]  70.1,59.94 90 top
U$244  [#_GND#0]  67.56,59.94 90 top
U$245  [#_SDA#2]  72.64,59.94 90 top
U$246  [#_SCL#3]  75.18,59.94 90 top